# EAGLE board SparkFun_Cryptographic_Co-processor_ATECC608A-Panel (EAGLE 9.6.2), part 1 of 2
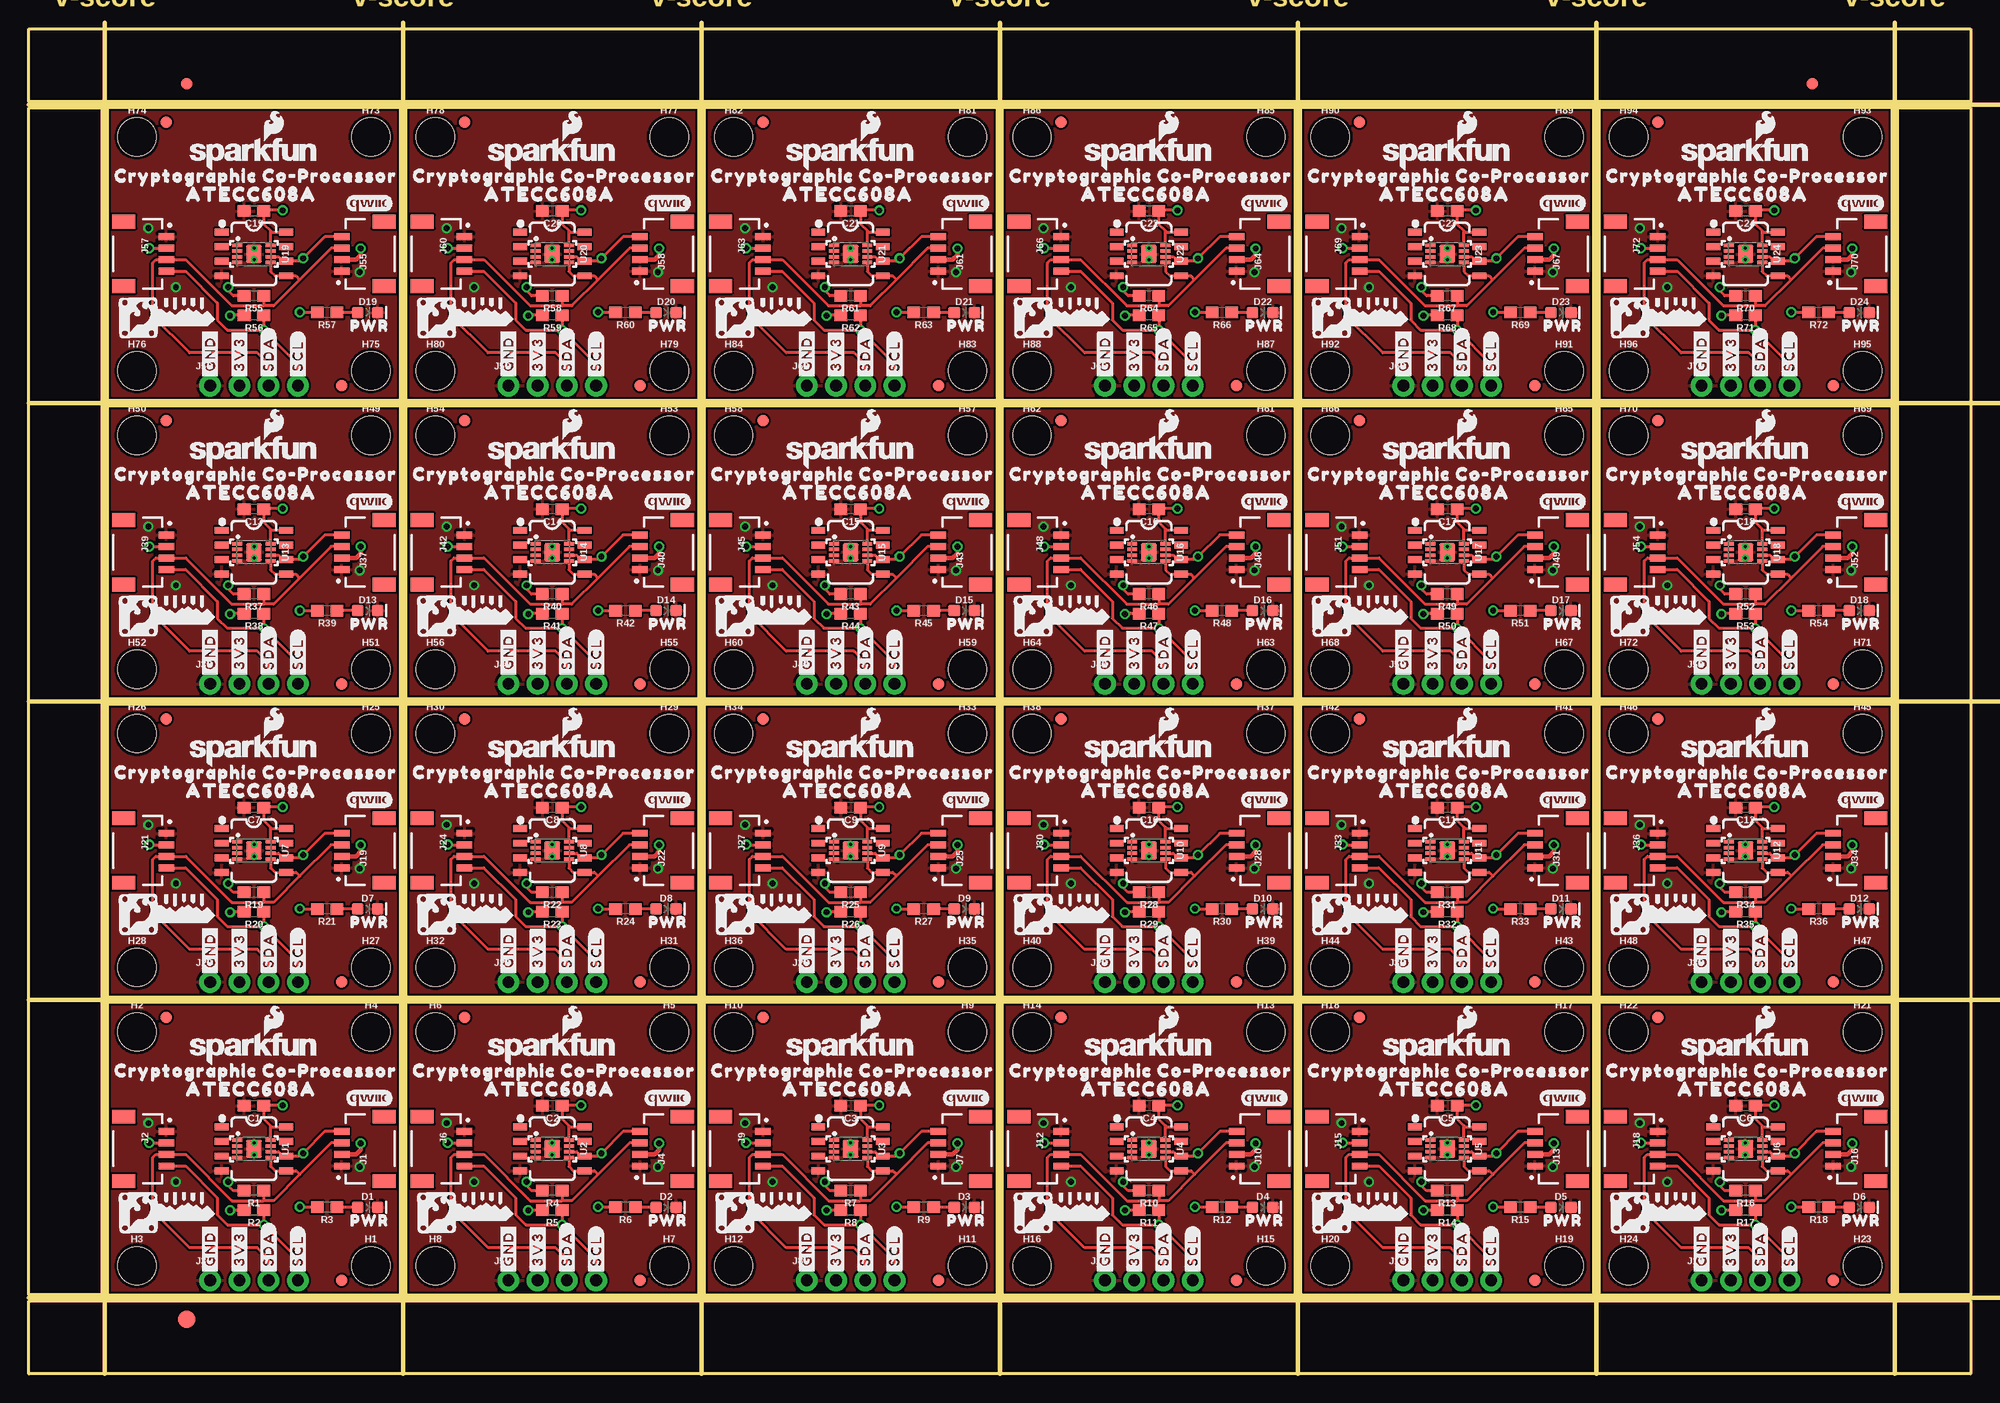
[diagram p0: board, top side]
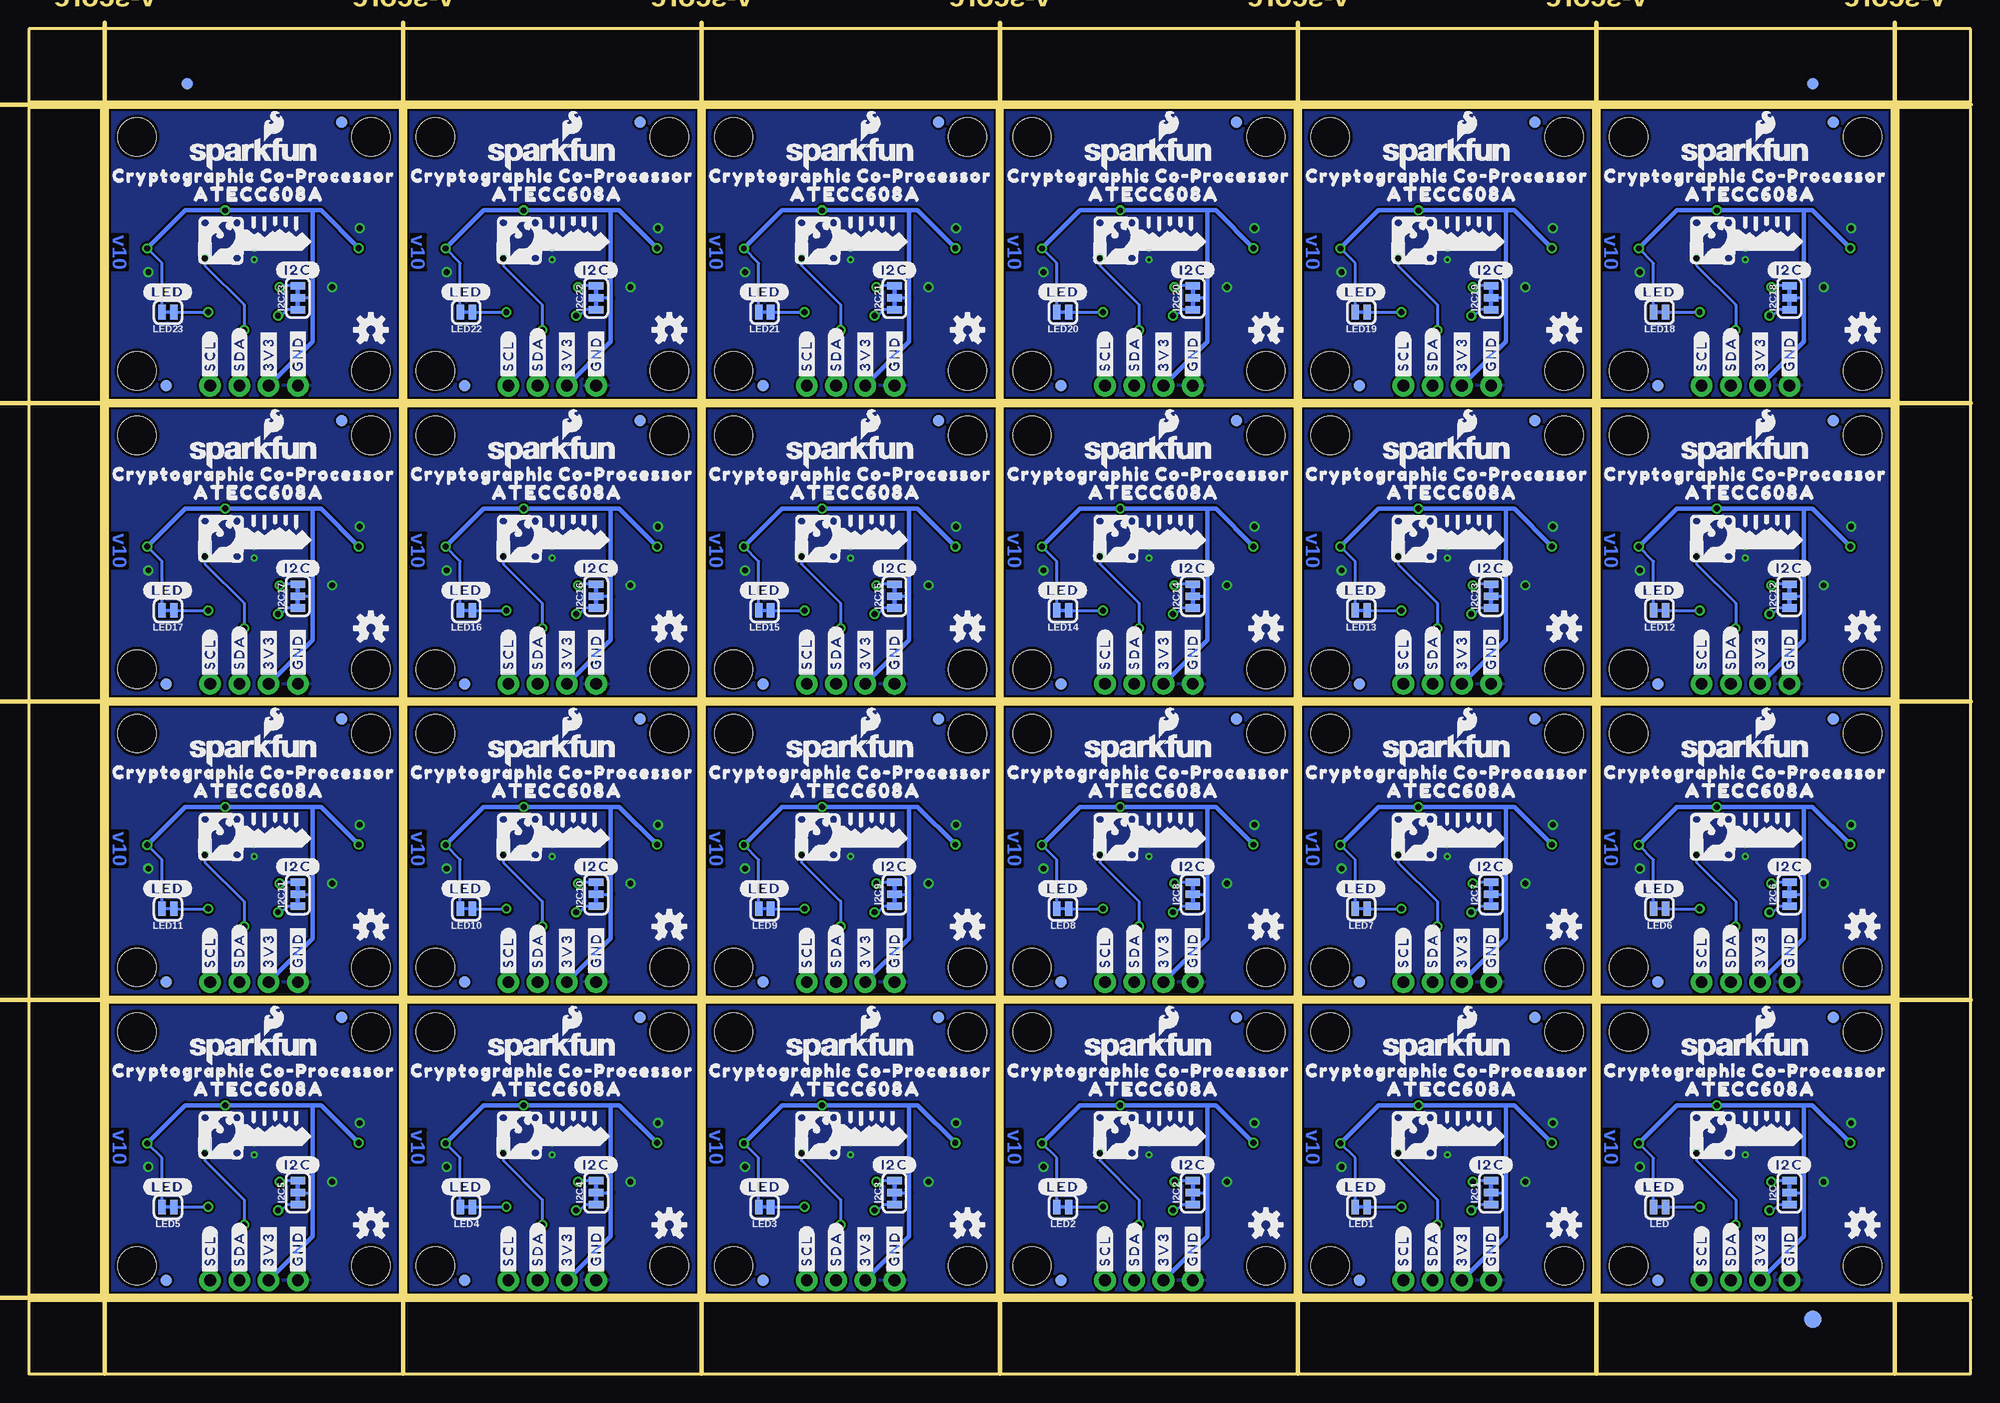
[diagram p1: board, bottom side, seen from below]

Size 168.66 x 116.84 mm. Coordinates in mm from the lower left corner, seen from the top.
Outline: 6.86,6.86 6.86,32.26 32.26,32.26 32.26,6.86 6.86,6.86
Outline: 32.77,6.86 32.77,32.26 58.17,32.26 58.17,6.86 32.77,6.86
Outline: 58.67,6.86 58.67,32.26 84.07,32.26 84.07,6.86 58.67,6.86
Outline: 84.58,6.86 84.58,32.26 109.98,32.26 109.98,6.86 84.58,6.86
Outline: 110.49,6.86 110.49,32.26 135.89,32.26 135.89,6.86 110.49,6.86
Outline: 136.4,6.86 136.4,32.26 161.8,32.26 161.8,6.86 136.4,6.86
Outline: 6.86,32.77 6.86,58.17 32.26,58.17 32.26,32.77 6.86,32.77
Outline: 32.77,32.77 32.77,58.17 58.17,58.17 58.17,32.77 32.77,32.77
Outline: 58.67,32.77 58.67,58.17 84.07,58.17 84.07,32.77 58.67,32.77
Outline: 84.58,32.77 84.58,58.17 109.98,58.17 109.98,32.77 84.58,32.77
Outline: 110.49,32.77 110.49,58.17 135.89,58.17 135.89,32.77 110.49,32.77
Outline: 136.4,32.77 136.4,58.17 161.8,58.17 161.8,32.77 136.4,32.77
Outline: 6.86,58.67 6.86,84.07 32.26,84.07 32.26,58.67 6.86,58.67
Outline: 32.77,58.67 32.77,84.07 58.17,84.07 58.17,58.67 32.77,58.67
Outline: 58.67,58.67 58.67,84.07 84.07,84.07 84.07,58.67 58.67,58.67
Outline: 84.58,58.67 84.58,84.07 109.98,84.07 109.98,58.67 84.58,58.67
Outline: 110.49,58.67 110.49,84.07 135.89,84.07 135.89,58.67 110.49,58.67
Outline: 136.4,58.67 136.4,84.07 161.8,84.07 161.8,58.67 136.4,58.67
Outline: 6.86,84.58 6.86,109.98 32.26,109.98 32.26,84.58 6.86,84.58
Outline: 32.77,84.58 32.77,109.98 58.17,109.98 58.17,84.58 32.77,84.58
Outline: 58.67,84.58 58.67,109.98 84.07,109.98 84.07,84.58 58.67,84.58
Outline: 84.58,84.58 84.58,109.98 109.98,109.98 109.98,84.58 84.58,84.58
Outline: 110.49,84.58 110.49,109.98 135.89,109.98 135.89,84.58 110.49,84.58
Outline: 136.4,84.58 136.4,109.98 161.8,109.98 161.8,84.58 136.4,84.58
Outline: 0,6.35 168.66,6.35 168.66,0 0,0 0,6.35
Outline: 162.31,109.98 168.66,109.98 168.66,6.86 162.31,6.86 162.31,109.98
Outline: 0,116.84 168.66,116.84 168.66,110.49 0,110.49 0,116.84
Outline: 0,109.98 6.35,109.98 6.35,6.86 0,6.86 0,109.98
Copper layers (1*16): Top 0.035mm / dielectric 1.5mm / Bottom 0.035mm
Design rules "SparkFun_Cryptographic_Co-processor_ATECC608A": minimum track width 7mil, minimum drill 0.3mm, track to track 7mil, track to pad 7mil, pad to pad 7mil, via to via 7mil, smd to smd 7mil, copper to edge 7mil, drill to drill 7mil, minimum pad ring 7mil, minimum via ring 7mil, stop-mask expansion 3mil, vias tented up to drill 25mil, thermal gap 10mil
Milling: 12 lines

## Footprints (pad centres in the part's own frame; a part is rotated, then mirrored left to right if it is on the bottom)
0603 = smd 1.1 x 1: 1 -0.85,0; 2 0.85,0
LED-0603 = smd 1 x 1: A -0.877,0; C 0.877,0
FIDUCIAL-1X2 = smd 1 x 1: 1 0,0
FIDUCIAL-1.5X3 = smd 1.5 x 1.5: 1 0,0
STAND-OFF = hole 3.302: 0,0
SMT-JUMPER_3_2-NC_TRACE_SILK = smd 0.66 x 1.27: 1 -1.041,0; 2 0,0; 3 1.041,0
JST04_1MM_RA = smd 0.6 x 1.35: 1 -1.5,0; 2 -0.5,0; 3 0.5,0; 4 1.5,0 | smd 1.2 x 2: NC1 2.8,-3.675; NC2 -2.8,-3.675
1X04_NO_SILK = drill 1.016 pad 1.88: 1 0,0; 2 2.54,0; 3 5.08,0; 4 7.62,0
SMT-JUMPER_2_NC_TRACE_SILK = smd 0.66 x 1.27: 1 -0.521,0; 2 0.521,0
DUAL_UDFN_2X3MM_SOIC-8 = smd 0.3 x 0.85: 1 -0.75,-1.45; 2 -0.25,-1.45; 3 0.25,-1.45; 4 0.75,-1.45; 5 0.75,1.45; 6 0.25,1.45; 7 -0.25,1.45; 8 -0.75,1.45 | smd 0.6 x 1.2: 1S -1.905,-2.8; 2S -0.635,-2.8; 3S 0.635,-2.8; 4S 1.905,-2.8; 5S 1.905,2.8; 6S 0.635,2.8; 7S -0.635,2.8; 8S -1.905,2.8 | smd 1.6 x 1.4: P 0,0

## Placement (x,y rotation side)
C1  0.1uF  [0603]  19.56,23.29 180 top
C2  0.1uF  [0603]  45.47,23.29 180 top
C3  0.1uF  [0603]  71.37,23.29 180 top
C4  0.1uF  [0603]  97.28,23.29 180 top
C5  0.1uF  [0603]  123.19,23.29 180 top
C6  0.1uF  [0603]  149.1,23.29 180 top
C7  0.1uF  [0603]  19.56,49.2 180 top
C8  0.1uF  [0603]  45.47,49.2 180 top
C9  0.1uF  [0603]  71.37,49.2 180 top
C10  0.1uF  [0603]  97.28,49.2 180 top
C11  0.1uF  [0603]  123.19,49.2 180 top
C12  0.1uF  [0603]  149.1,49.2 180 top
C13  0.1uF  [0603]  19.56,75.11 180 top
C14  0.1uF  [0603]  45.47,75.11 180 top
C15  0.1uF  [0603]  71.37,75.11 180 top
C16  0.1uF  [0603]  97.28,75.11 180 top
C17  0.1uF  [0603]  123.19,75.11 180 top
C18  0.1uF  [0603]  149.1,75.11 180 top
C19  0.1uF  [0603]  19.56,101.02 180 top
C20  0.1uF  [0603]  45.47,101.02 180 top
C21  0.1uF  [0603]  71.37,101.02 180 top
C22  0.1uF  [0603]  97.28,101.02 180 top
C23  0.1uF  [0603]  123.19,101.02 180 top
C24  0.1uF  [0603]  149.1,101.02 180 top
D1  RED  [LED-0603]  29.44,14.48 0 top
D2  RED  [LED-0603]  55.35,14.48 0 top
D3  RED  [LED-0603]  81.25,14.48 0 top
D4  RED  [LED-0603]  107.16,14.48 0 top
D5  RED  [LED-0603]  133.07,14.48 0 top
D6  RED  [LED-0603]  158.98,14.48 0 top
D7  RED  [LED-0603]  29.44,40.39 0 top
D8  RED  [LED-0603]  55.35,40.39 0 top
D9  RED  [LED-0603]  81.25,40.39 0 top
D10  RED  [LED-0603]  107.16,40.39 0 top
D11  RED  [LED-0603]  133.07,40.39 0 top
D12  RED  [LED-0603]  158.98,40.39 0 top
D13  RED  [LED-0603]  29.44,66.29 0 top
D14  RED  [LED-0603]  55.35,66.29 0 top
D15  RED  [LED-0603]  81.25,66.29 0 top
D16  RED  [LED-0603]  107.16,66.29 0 top
D17  RED  [LED-0603]  133.07,66.29 0 top
D18  RED  [LED-0603]  158.98,66.29 0 top
D19  RED  [LED-0603]  29.44,92.2 0 top
D20  RED  [LED-0603]  55.35,92.2 0 top
D21  RED  [LED-0603]  81.25,92.2 0 top
D22  RED  [LED-0603]  107.16,92.2 0 top
D23  RED  [LED-0603]  133.07,92.2 0 top
D24  RED  [LED-0603]  158.98,92.2 0 top
E$1  [FIDUCIAL-1X2]  13.72,112.08 0 top
E$2  [FIDUCIAL-1X2]  13.72,112.08 0 bottom
E$3  [FIDUCIAL-1X2]  154.88,112.08 0 top
E$4  [FIDUCIAL-1X2]  154.88,112.08 0 bottom
E$5  [FIDUCIAL-1.5X3]  13.72,4.76 0 top
E$6  [FIDUCIAL-1.5X3]  13.72,4.76 0 bottom
FD1  FIDUCIAL1X2  [FIDUCIAL-1X2]  11.94,30.99 0 top
FD2  FIDUCIAL1X2  [FIDUCIAL-1X2]  27.18,8.13 0 top
FD3  FIDUCIAL1X2  [FIDUCIAL-1X2]  27.18,8.13 0 bottom
FD4  FIDUCIAL1X2  [FIDUCIAL-1X2]  11.94,30.99 0 bottom
FD5  FIDUCIAL1X2  [FIDUCIAL-1X2]  37.85,30.99 0 top
FD6  FIDUCIAL1X2  [FIDUCIAL-1X2]  53.09,8.13 0 top
FD7  FIDUCIAL1X2  [FIDUCIAL-1X2]  53.09,8.13 0 bottom
FD8  FIDUCIAL1X2  [FIDUCIAL-1X2]  37.85,30.99 0 bottom
FD9  FIDUCIAL1X2  [FIDUCIAL-1X2]  63.75,30.99 0 top
FD10  FIDUCIAL1X2  [FIDUCIAL-1X2]  78.99,8.13 0 top
FD11  FIDUCIAL1X2  [FIDUCIAL-1X2]  78.99,8.13 0 bottom
FD12  FIDUCIAL1X2  [FIDUCIAL-1X2]  63.75,30.99 0 bottom
FD13  FIDUCIAL1X2  [FIDUCIAL-1X2]  89.66,30.99 0 top
FD14  FIDUCIAL1X2  [FIDUCIAL-1X2]  104.9,8.13 0 top
FD15  FIDUCIAL1X2  [FIDUCIAL-1X2]  104.9,8.13 0 bottom
FD16  FIDUCIAL1X2  [FIDUCIAL-1X2]  89.66,30.99 0 bottom
FD17  FIDUCIAL1X2  [FIDUCIAL-1X2]  115.57,30.99 0 top
FD18  FIDUCIAL1X2  [FIDUCIAL-1X2]  130.81,8.13 0 top
FD19  FIDUCIAL1X2  [FIDUCIAL-1X2]  130.81,8.13 0 bottom
FD20  FIDUCIAL1X2  [FIDUCIAL-1X2]  115.57,30.99 0 bottom
FD21  FIDUCIAL1X2  [FIDUCIAL-1X2]  141.48,30.99 0 top
FD22  FIDUCIAL1X2  [FIDUCIAL-1X2]  156.72,8.13 0 top
FD23  FIDUCIAL1X2  [FIDUCIAL-1X2]  156.72,8.13 0 bottom
FD24  FIDUCIAL1X2  [FIDUCIAL-1X2]  141.48,30.99 0 bottom
FD25  FIDUCIAL1X2  [FIDUCIAL-1X2]  11.94,56.9 0 top
FD26  FIDUCIAL1X2  [FIDUCIAL-1X2]  27.18,34.04 0 top
FD27  FIDUCIAL1X2  [FIDUCIAL-1X2]  27.18,34.04 0 bottom
FD28  FIDUCIAL1X2  [FIDUCIAL-1X2]  11.94,56.9 0 bottom
FD29  FIDUCIAL1X2  [FIDUCIAL-1X2]  37.85,56.9 0 top
FD30  FIDUCIAL1X2  [FIDUCIAL-1X2]  53.09,34.04 0 top
FD31  FIDUCIAL1X2  [FIDUCIAL-1X2]  53.09,34.04 0 bottom
FD32  FIDUCIAL1X2  [FIDUCIAL-1X2]  37.85,56.9 0 bottom
FD33  FIDUCIAL1X2  [FIDUCIAL-1X2]  63.75,56.9 0 top
FD34  FIDUCIAL1X2  [FIDUCIAL-1X2]  78.99,34.04 0 top
FD35  FIDUCIAL1X2  [FIDUCIAL-1X2]  78.99,34.04 0 bottom
FD36  FIDUCIAL1X2  [FIDUCIAL-1X2]  63.75,56.9 0 bottom
FD37  FIDUCIAL1X2  [FIDUCIAL-1X2]  89.66,56.9 0 top
FD38  FIDUCIAL1X2  [FIDUCIAL-1X2]  104.9,34.04 0 top
FD39  FIDUCIAL1X2  [FIDUCIAL-1X2]  104.9,34.04 0 bottom
FD40  FIDUCIAL1X2  [FIDUCIAL-1X2]  89.66,56.9 0 bottom
FD41  FIDUCIAL1X2  [FIDUCIAL-1X2]  115.57,56.9 0 top
FD42  FIDUCIAL1X2  [FIDUCIAL-1X2]  130.81,34.04 0 top
FD43  FIDUCIAL1X2  [FIDUCIAL-1X2]  130.81,34.04 0 bottom
FD44  FIDUCIAL1X2  [FIDUCIAL-1X2]  115.57,56.9 0 bottom
FD45  FIDUCIAL1X2  [FIDUCIAL-1X2]  141.48,56.9 0 top
FD46  FIDUCIAL1X2  [FIDUCIAL-1X2]  156.72,34.04 0 top
FD47  FIDUCIAL1X2  [FIDUCIAL-1X2]  156.72,34.04 0 bottom
FD48  FIDUCIAL1X2  [FIDUCIAL-1X2]  141.48,56.9 0 bottom
FD49  FIDUCIAL1X2  [FIDUCIAL-1X2]  11.94,82.8 0 top
FD50  FIDUCIAL1X2  [FIDUCIAL-1X2]  27.18,59.94 0 top
FD51  FIDUCIAL1X2  [FIDUCIAL-1X2]  27.18,59.94 0 bottom
FD52  FIDUCIAL1X2  [FIDUCIAL-1X2]  11.94,82.8 0 bottom
FD53  FIDUCIAL1X2  [FIDUCIAL-1X2]  37.85,82.8 0 top
FD54  FIDUCIAL1X2  [FIDUCIAL-1X2]  53.09,59.94 0 top
FD55  FIDUCIAL1X2  [FIDUCIAL-1X2]  53.09,59.94 0 bottom
FD56  FIDUCIAL1X2  [FIDUCIAL-1X2]  37.85,82.8 0 bottom
FD57  FIDUCIAL1X2  [FIDUCIAL-1X2]  63.75,82.8 0 top
FD58  FIDUCIAL1X2  [FIDUCIAL-1X2]  78.99,59.94 0 top
FD59  FIDUCIAL1X2  [FIDUCIAL-1X2]  78.99,59.94 0 bottom
FD60  FIDUCIAL1X2  [FIDUCIAL-1X2]  63.75,82.8 0 bottom
FD61  FIDUCIAL1X2  [FIDUCIAL-1X2]  89.66,82.8 0 top
FD62  FIDUCIAL1X2  [FIDUCIAL-1X2]  104.9,59.94 0 top
FD63  FIDUCIAL1X2  [FIDUCIAL-1X2]  104.9,59.94 0 bottom
FD64  FIDUCIAL1X2  [FIDUCIAL-1X2]  89.66,82.8 0 bottom
FD65  FIDUCIAL1X2  [FIDUCIAL-1X2]  115.57,82.8 0 top
FD66  FIDUCIAL1X2  [FIDUCIAL-1X2]  130.81,59.94 0 top
FD67  FIDUCIAL1X2  [FIDUCIAL-1X2]  130.81,59.94 0 bottom
FD68  FIDUCIAL1X2  [FIDUCIAL-1X2]  115.57,82.8 0 bottom
FD69  FIDUCIAL1X2  [FIDUCIAL-1X2]  141.48,82.8 0 top
FD70  FIDUCIAL1X2  [FIDUCIAL-1X2]  156.72,59.94 0 top
FD71  FIDUCIAL1X2  [FIDUCIAL-1X2]  156.72,59.94 0 bottom
FD72  FIDUCIAL1X2  [FIDUCIAL-1X2]  141.48,82.8 0 bottom
FD73  FIDUCIAL1X2  [FIDUCIAL-1X2]  11.94,108.71 0 top
FD74  FIDUCIAL1X2  [FIDUCIAL-1X2]  27.18,85.85 0 top
FD75  FIDUCIAL1X2  [FIDUCIAL-1X2]  27.18,85.85 0 bottom
FD76  FIDUCIAL1X2  [FIDUCIAL-1X2]  11.94,108.71 0 bottom
FD77  FIDUCIAL1X2  [FIDUCIAL-1X2]  37.85,108.71 0 top
FD78  FIDUCIAL1X2  [FIDUCIAL-1X2]  53.09,85.85 0 top
FD79  FIDUCIAL1X2  [FIDUCIAL-1X2]  53.09,85.85 0 bottom
FD80  FIDUCIAL1X2  [FIDUCIAL-1X2]  37.85,108.71 0 bottom
FD81  FIDUCIAL1X2  [FIDUCIAL-1X2]  63.75,108.71 0 top
FD82  FIDUCIAL1X2  [FIDUCIAL-1X2]  78.99,85.85 0 top
FD83  FIDUCIAL1X2  [FIDUCIAL-1X2]  78.99,85.85 0 bottom
FD84  FIDUCIAL1X2  [FIDUCIAL-1X2]  63.75,108.71 0 bottom
FD85  FIDUCIAL1X2  [FIDUCIAL-1X2]  89.66,108.71 0 top
FD86  FIDUCIAL1X2  [FIDUCIAL-1X2]  104.9,85.85 0 top
FD87  FIDUCIAL1X2  [FIDUCIAL-1X2]  104.9,85.85 0 bottom
FD88  FIDUCIAL1X2  [FIDUCIAL-1X2]  89.66,108.71 0 bottom
FD89  FIDUCIAL1X2  [FIDUCIAL-1X2]  115.57,108.71 0 top
FD90  FIDUCIAL1X2  [FIDUCIAL-1X2]  130.81,85.85 0 top
FD91  FIDUCIAL1X2  [FIDUCIAL-1X2]  130.81,85.85 0 bottom
FD92  FIDUCIAL1X2  [FIDUCIAL-1X2]  115.57,108.71 0 bottom
FD93  FIDUCIAL1X2  [FIDUCIAL-1X2]  141.48,108.71 0 top
FD94  FIDUCIAL1X2  [FIDUCIAL-1X2]  156.72,85.85 0 top
FD95  FIDUCIAL1X2  [FIDUCIAL-1X2]  156.72,85.85 0 bottom
FD96  FIDUCIAL1X2  [FIDUCIAL-1X2]  141.48,108.71 0 bottom
H1  STAND-OFF  [STAND-OFF]  29.72,9.4 0 top
H2  STAND-OFF  [STAND-OFF]  9.4,29.72 0 top
H3  STAND-OFF  [STAND-OFF]  9.4,9.4 0 top
H4  STAND-OFF  [STAND-OFF]  29.72,29.72 0 top
H5  STAND-OFF  [STAND-OFF]  55.63,29.72 0 top
H6  STAND-OFF  [STAND-OFF]  35.31,29.72 0 top
H7  STAND-OFF  [STAND-OFF]  55.63,9.4 0 top
H8  STAND-OFF  [STAND-OFF]  35.31,9.4 0 top
H9  STAND-OFF  [STAND-OFF]  81.53,29.72 0 top
H10  STAND-OFF  [STAND-OFF]  61.21,29.72 0 top
H11  STAND-OFF  [STAND-OFF]  81.53,9.4 0 top
H12  STAND-OFF  [STAND-OFF]  61.21,9.4 0 top
H13  STAND-OFF  [STAND-OFF]  107.44,29.72 0 top
H14  STAND-OFF  [STAND-OFF]  87.12,29.72 0 top
H15  STAND-OFF  [STAND-OFF]  107.44,9.4 0 top
H16  STAND-OFF  [STAND-OFF]  87.12,9.4 0 top
H17  STAND-OFF  [STAND-OFF]  133.35,29.72 0 top
H18  STAND-OFF  [STAND-OFF]  113.03,29.72 0 top
H19  STAND-OFF  [STAND-OFF]  133.35,9.4 0 top
H20  STAND-OFF  [STAND-OFF]  113.03,9.4 0 top
H21  STAND-OFF  [STAND-OFF]  159.26,29.72 0 top
H22  STAND-OFF  [STAND-OFF]  138.94,29.72 0 top
H23  STAND-OFF  [STAND-OFF]  159.26,9.4 0 top
H24  STAND-OFF  [STAND-OFF]  138.94,9.4 0 top
H25  STAND-OFF  [STAND-OFF]  29.72,55.63 0 top
H26  STAND-OFF  [STAND-OFF]  9.4,55.63 0 top
H27  STAND-OFF  [STAND-OFF]  29.72,35.31 0 top
H28  STAND-OFF  [STAND-OFF]  9.4,35.31 0 top
H29  STAND-OFF  [STAND-OFF]  55.63,55.63 0 top
H30  STAND-OFF  [STAND-OFF]  35.31,55.63 0 top
H31  STAND-OFF  [STAND-OFF]  55.63,35.31 0 top
H32  STAND-OFF  [STAND-OFF]  35.31,35.31 0 top
H33  STAND-OFF  [STAND-OFF]  81.53,55.63 0 top
H34  STAND-OFF  [STAND-OFF]  61.21,55.63 0 top
H35  STAND-OFF  [STAND-OFF]  81.53,35.31 0 top
H36  STAND-OFF  [STAND-OFF]  61.21,35.31 0 top
H37  STAND-OFF  [STAND-OFF]  107.44,55.63 0 top
H38  STAND-OFF  [STAND-OFF]  87.12,55.63 0 top
H39  STAND-OFF  [STAND-OFF]  107.44,35.31 0 top
H40  STAND-OFF  [STAND-OFF]  87.12,35.31 0 top
H41  STAND-OFF  [STAND-OFF]  133.35,55.63 0 top
H42  STAND-OFF  [STAND-OFF]  113.03,55.63 0 top
H43  STAND-OFF  [STAND-OFF]  133.35,35.31 0 top
H44  STAND-OFF  [STAND-OFF]  113.03,35.31 0 top
H45  STAND-OFF  [STAND-OFF]  159.26,55.63 0 top
H46  STAND-OFF  [STAND-OFF]  138.94,55.63 0 top
H47  STAND-OFF  [STAND-OFF]  159.26,35.31 0 top
H48  STAND-OFF  [STAND-OFF]  138.94,35.31 0 top
H49  STAND-OFF  [STAND-OFF]  29.72,81.53 0 top
H50  STAND-OFF  [STAND-OFF]  9.4,81.53 0 top
H51  STAND-OFF  [STAND-OFF]  29.72,61.21 0 top
H52  STAND-OFF  [STAND-OFF]  9.4,61.21 0 top
H53  STAND-OFF  [STAND-OFF]  55.63,81.53 0 top
H54  STAND-OFF  [STAND-OFF]  35.31,81.53 0 top
H55  STAND-OFF  [STAND-OFF]  55.63,61.21 0 top
H56  STAND-OFF  [STAND-OFF]  35.31,61.21 0 top
H57  STAND-OFF  [STAND-OFF]  81.53,81.53 0 top
H58  STAND-OFF  [STAND-OFF]  61.21,81.53 0 top
H59  STAND-OFF  [STAND-OFF]  81.53,61.21 0 top
H60  STAND-OFF  [STAND-OFF]  61.21,61.21 0 top
H61  STAND-OFF  [STAND-OFF]  107.44,81.53 0 top
H62  STAND-OFF  [STAND-OFF]  87.12,81.53 0 top
H63  STAND-OFF  [STAND-OFF]  107.44,61.21 0 top
H64  STAND-OFF  [STAND-OFF]  87.12,61.21 0 top
H65  STAND-OFF  [STAND-OFF]  133.35,81.53 0 top
H66  STAND-OFF  [STAND-OFF]  113.03,81.53 0 top
H67  STAND-OFF  [STAND-OFF]  133.35,61.21 0 top
H68  STAND-OFF  [STAND-OFF]  113.03,61.21 0 top
H69  STAND-OFF  [STAND-OFF]  159.26,81.53 0 top
H70  STAND-OFF  [STAND-OFF]  138.94,81.53 0 top
H71  STAND-OFF  [STAND-OFF]  159.26,61.21 0 top
H72  STAND-OFF  [STAND-OFF]  138.94,61.21 0 top
H73  STAND-OFF  [STAND-OFF]  29.72,107.44 0 top
H74  STAND-OFF  [STAND-OFF]  9.4,107.44 0 top
H75  STAND-OFF  [STAND-OFF]  29.72,87.12 0 top
H76  STAND-OFF  [STAND-OFF]  9.4,87.12 0 top
H77  STAND-OFF  [STAND-OFF]  55.63,107.44 0 top
H78  STAND-OFF  [STAND-OFF]  35.31,107.44 0 top
H79  STAND-OFF  [STAND-OFF]  55.63,87.12 0 top
H80  STAND-OFF  [STAND-OFF]  35.31,87.12 0 top
H81  STAND-OFF  [STAND-OFF]  81.53,107.44 0 top
H82  STAND-OFF  [STAND-OFF]  61.21,107.44 0 top
H83  STAND-OFF  [STAND-OFF]  81.53,87.12 0 top
H84  STAND-OFF  [STAND-OFF]  61.21,87.12 0 top
H85  STAND-OFF  [STAND-OFF]  107.44,107.44 0 top
H86  STAND-OFF  [STAND-OFF]  87.12,107.44 0 top
H87  STAND-OFF  [STAND-OFF]  107.44,87.12 0 top
H88  STAND-OFF  [STAND-OFF]  87.12,87.12 0 top
H89  STAND-OFF  [STAND-OFF]  133.35,107.44 0 top
H90  STAND-OFF  [STAND-OFF]  113.03,107.44 0 top
H91  STAND-OFF  [STAND-OFF]  133.35,87.12 0 top
H92  STAND-OFF  [STAND-OFF]  113.03,87.12 0 top
H93  STAND-OFF  [STAND-OFF]  159.26,107.44 0 top
H94  STAND-OFF  [STAND-OFF]  138.94,107.44 0 top
H95  STAND-OFF  [STAND-OFF]  159.26,87.12 0 top
H96  STAND-OFF  [STAND-OFF]  138.94,87.12 0 top
I2C  [SMT-JUMPER_3_2-NC_TRACE_SILK]  15.75,15.75 90 bottom
I2C1  [SMT-JUMPER_3_2-NC_TRACE_SILK]  41.66,15.75 90 bottom
I2C2  [SMT-JUMPER_3_2-NC_TRACE_SILK]  67.56,15.75 90 bottom
I2C3  [SMT-JUMPER_3_2-NC_TRACE_SILK]  93.47,15.75 90 bottom
I2C4  [SMT-JUMPER_3_2-NC_TRACE_SILK]  119.38,15.75 90 bottom
I2C5  [SMT-JUMPER_3_2-NC_TRACE_SILK]  145.29,15.75 90 bottom
I2C6  [SMT-JUMPER_3_2-NC_TRACE_SILK]  15.75,41.66 90 bottom
I2C7  [SMT-JUMPER_3_2-NC_TRACE_SILK]  41.66,41.66 90 bottom
I2C8  [SMT-JUMPER_3_2-NC_TRACE_SILK]  67.56,41.66 90 bottom
I2C9  [SMT-JUMPER_3_2-NC_TRACE_SILK]  93.47,41.66 90 bottom
I2C10  [SMT-JUMPER_3_2-NC_TRACE_SILK]  119.38,41.66 90 bottom
I2C11  [SMT-JUMPER_3_2-NC_TRACE_SILK]  145.29,41.66 90 bottom
I2C12  [SMT-JUMPER_3_2-NC_TRACE_SILK]  15.75,67.56 90 bottom
I2C13  [SMT-JUMPER_3_2-NC_TRACE_SILK]  41.66,67.56 90 bottom
I2C14  [SMT-JUMPER_3_2-NC_TRACE_SILK]  67.56,67.56 90 bottom
I2C15  [SMT-JUMPER_3_2-NC_TRACE_SILK]  93.47,67.56 90 bottom
I2C16  [SMT-JUMPER_3_2-NC_TRACE_SILK]  119.38,67.56 90 bottom
I2C17  [SMT-JUMPER_3_2-NC_TRACE_SILK]  145.29,67.56 90 bottom
I2C18  [SMT-JUMPER_3_2-NC_TRACE_SILK]  15.75,93.47 90 bottom
I2C19  [SMT-JUMPER_3_2-NC_TRACE_SILK]  41.66,93.47 90 bottom
I2C20  [SMT-JUMPER_3_2-NC_TRACE_SILK]  67.56,93.47 90 bottom
I2C21  [SMT-JUMPER_3_2-NC_TRACE_SILK]  93.47,93.47 90 bottom
I2C22  [SMT-JUMPER_3_2-NC_TRACE_SILK]  119.38,93.47 90 bottom
I2C23  [SMT-JUMPER_3_2-NC_TRACE_SILK]  145.29,93.47 90 bottom
J1  QWIIC  [JST04_1MM_RA]  27.18,19.56 90 top
J2  QWIIC  [JST04_1MM_RA]  11.94,19.56 270 top
J3  PTH  [1X04_NO_SILK]  15.75,8.13 0 top
J4  QWIIC  [JST04_1MM_RA]  53.09,19.56 90 top
J5  PTH  [1X04_NO_SILK]  41.66,8.13 0 top
J6  QWIIC  [JST04_1MM_RA]  37.85,19.56 270 top
J7  QWIIC  [JST04_1MM_RA]  78.99,19.56 90 top
J8  PTH  [1X04_NO_SILK]  67.56,8.13 0 top
J9  QWIIC  [JST04_1MM_RA]  63.75,19.56 270 top
J10  QWIIC  [JST04_1MM_RA]  104.9,19.56 90 top
J11  PTH  [1X04_NO_SILK]  93.47,8.13 0 top
J12  QWIIC  [JST04_1MM_RA]  89.66,19.56 270 top
J13  QWIIC  [JST04_1MM_RA]  130.81,19.56 90 top
J14  PTH  [1X04_NO_SILK]  119.38,8.13 0 top
J15  QWIIC  [JST04_1MM_RA]  115.57,19.56 270 top
J16  QWIIC  [JST04_1MM_RA]  156.72,19.56 90 top
J17  PTH  [1X04_NO_SILK]  145.29,8.13 0 top
J18  QWIIC  [JST04_1MM_RA]  141.48,19.56 270 top
J19  QWIIC  [JST04_1MM_RA]  27.18,45.47 90 top
J20  PTH  [1X04_NO_SILK]  15.75,34.04 0 top
J21  QWIIC  [JST04_1MM_RA]  11.94,45.47 270 top
J22  QWIIC  [JST04_1MM_RA]  53.09,45.47 90 top
J23  PTH  [1X04_NO_SILK]  41.66,34.04 0 top
J24  QWIIC  [JST04_1MM_RA]  37.85,45.47 270 top
J25  QWIIC  [JST04_1MM_RA]  78.99,45.47 90 top
J26  PTH  [1X04_NO_SILK]  67.56,34.04 0 top
J27  QWIIC  [JST04_1MM_RA]  63.75,45.47 270 top
J28  QWIIC  [JST04_1MM_RA]  104.9,45.47 90 top
J29  PTH  [1X04_NO_SILK]  93.47,34.04 0 top
J30  QWIIC  [JST04_1MM_RA]  89.66,45.47 270 top
J31  QWIIC  [JST04_1MM_RA]  130.81,45.47 90 top
J32  PTH  [1X04_NO_SILK]  119.38,34.04 0 top
J33  QWIIC  [JST04_1MM_RA]  115.57,45.47 270 top
J34  QWIIC  [JST04_1MM_RA]  156.72,45.47 90 top
J35  PTH  [1X04_NO_SILK]  145.29,34.04 0 top
J36  QWIIC  [JST04_1MM_RA]  141.48,45.47 270 top
J37  QWIIC  [JST04_1MM_RA]  27.18,71.37 90 top
J38  PTH  [1X04_NO_SILK]  15.75,59.94 0 top
J39  QWIIC  [JST04_1MM_RA]  11.94,71.37 270 top
J40  QWIIC  [JST04_1MM_RA]  53.09,71.37 90 top
J41  PTH  [1X04_NO_SILK]  41.66,59.94 0 top
J42  QWIIC  [JST04_1MM_RA]  37.85,71.37 270 top
J43  QWIIC  [JST04_1MM_RA]  78.99,71.37 90 top
J44  PTH  [1X04_NO_SILK]  67.56,59.94 0 top
J45  QWIIC  [JST04_1MM_RA]  63.75,71.37 270 top
J46  QWIIC  [JST04_1MM_RA]  104.9,71.37 90 top
J47  PTH  [1X04_NO_SILK]  93.47,59.94 0 top
J48  QWIIC  [JST04_1MM_RA]  89.66,71.37 270 top
J49  QWIIC  [JST04_1MM_RA]  130.81,71.37 90 top
J50  PTH  [1X04_NO_SILK]  119.38,59.94 0 top
J51  QWIIC  [JST04_1MM_RA]  115.57,71.37 270 top
J52  QWIIC  [JST04_1MM_RA]  156.72,71.37 90 top
J53  PTH  [1X04_NO_SILK]  145.29,59.94 0 top
J54  QWIIC  [JST04_1MM_RA]  141.48,71.37 270 top
J55  QWIIC  [JST04_1MM_RA]  27.18,97.28 90 top
J56  PTH  [1X04_NO_SILK]  15.75,85.85 0 top
J57  QWIIC  [JST04_1MM_RA]  11.94,97.28 270 top
J58  QWIIC  [JST04_1MM_RA]  53.09,97.28 90 top
J59  PTH  [1X04_NO_SILK]  41.66,85.85 0 top
J60  QWIIC  [JST04_1MM_RA]  37.85,97.28 270 top
J61  QWIIC  [JST04_1MM_RA]  78.99,97.28 90 top
J62  PTH  [1X04_NO_SILK]  67.56,85.85 0 top
J63  QWIIC  [JST04_1MM_RA]  63.75,97.28 270 top
J64  QWIIC  [JST04_1MM_RA]  104.9,97.28 90 top
J65  PTH  [1X04_NO_SILK]  93.47,85.85 0 top
J66  QWIIC  [JST04_1MM_RA]  89.66,97.28 270 top
J67  QWIIC  [JST04_1MM_RA]  130.81,97.28 90 top
J68  PTH  [1X04_NO_SILK]  119.38,85.85 0 top
J69  QWIIC  [JST04_1MM_RA]  115.57,97.28 270 top
J70  QWIIC  [JST04_1MM_RA]  156.72,97.28 90 top
J71  PTH  [1X04_NO_SILK]  145.29,85.85 0 top
J72  QWIIC  [JST04_1MM_RA]  141.48,97.28 270 top
LED  [SMT-JUMPER_2_NC_TRACE_SILK]  27.03,14.5 180 bottom
LED1  [SMT-JUMPER_2_NC_TRACE_SILK]  52.93,14.5 180 bottom
LED2  [SMT-JUMPER_2_NC_TRACE_SILK]  78.84,14.5 180 bottom
LED3  [SMT-JUMPER_2_NC_TRACE_SILK]  104.75,14.5 180 bottom
LED4  [SMT-JUMPER_2_NC_TRACE_SILK]  130.66,14.5 180 bottom
LED5  [SMT-JUMPER_2_NC_TRACE_SILK]  156.57,14.5 180 bottom
LED6  [SMT-JUMPER_2_NC_TRACE_SILK]  27.03,40.41 180 bottom
LED7  [SMT-JUMPER_2_NC_TRACE_SILK]  52.93,40.41 180 bottom
LED8  [SMT-JUMPER_2_NC_TRACE_SILK]  78.84,40.41 180 bottom
LED9  [SMT-JUMPER_2_NC_TRACE_SILK]  104.75,40.41 180 bottom
LED10  [SMT-JUMPER_2_NC_TRACE_SILK]  130.66,40.41 180 bottom
LED11  [SMT-JUMPER_2_NC_TRACE_SILK]  156.57,40.41 180 bottom
LED12  [SMT-JUMPER_2_NC_TRACE_SILK]  27.03,66.32 180 bottom
LED13  [SMT-JUMPER_2_NC_TRACE_SILK]  52.93,66.32 180 bottom
LED14  [SMT-JUMPER_2_NC_TRACE_SILK]  78.84,66.32 180 bottom
LED15  [SMT-JUMPER_2_NC_TRACE_SILK]  104.75,66.32 180 bottom
LED16  [SMT-JUMPER_2_NC_TRACE_SILK]  130.66,66.32 180 bottom
LED17  [SMT-JUMPER_2_NC_TRACE_SILK]  156.57,66.32 180 bottom
LED18  [SMT-JUMPER_2_NC_TRACE_SILK]  27.03,92.23 180 bottom
LED19  [SMT-JUMPER_2_NC_TRACE_SILK]  52.93,92.23 180 bottom
LED20  [SMT-JUMPER_2_NC_TRACE_SILK]  78.84,92.23 180 bottom
LED21  [SMT-JUMPER_2_NC_TRACE_SILK]  104.75,92.23 180 bottom
LED22  [SMT-JUMPER_2_NC_TRACE_SILK]  130.66,92.23 180 bottom
LED23  [SMT-JUMPER_2_NC_TRACE_SILK]  156.57,92.23 180 bottom
LOGO1  SFE_LOGO_NAME_FLAME.1_INCH  [SFE_LOGO_NAME_FLAME_.1]  19.56,28.26 0 top
LOGO2  SFE_LOGO_NAME_FLAME.1_INCH  [SFE_LOGO_NAME_FLAME_.1]  19.56,28.26 0 bottom
LOGO3  QWIIC_LOGO_4MM  [QWIIC_4MM]  29.59,23.95 0 top
LOGO4  OSHW-LOGOS  [OSHW-LOGO-S]  9.4,12.95 0 bottom
LOGO5  OSHW-LOGOS  [OSHW-LOGO-S]  35.31,12.95 0 bottom
LOGO6  SFE_LOGO_NAME_FLAME.1_INCH  [SFE_LOGO_NAME_FLAME_.1]  45.47,28.26 0 top
LOGO7  SFE_LOGO_NAME_FLAME.1_INCH  [SFE_LOGO_NAME_FLAME_.1]  45.47,28.26 0 bottom
LOGO8  QWIIC_LOGO_4MM  [QWIIC_4MM]  55.5,23.95 0 top
LOGO9  OSHW-LOGOS  [OSHW-LOGO-S]  61.21,12.95 0 bottom
LOGO10  SFE_LOGO_NAME_FLAME.1_INCH  [SFE_LOGO_NAME_FLAME_.1]  71.37,28.26 0 top
LOGO11  SFE_LOGO_NAME_FLAME.1_INCH  [SFE_LOGO_NAME_FLAME_.1]  71.37,28.26 0 bottom
LOGO12  QWIIC_LOGO_4MM  [QWIIC_4MM]  81.41,23.95 0 top
LOGO13  OSHW-LOGOS  [OSHW-LOGO-S]  87.12,12.95 0 bottom
LOGO14  SFE_LOGO_NAME_FLAME.1_INCH  [SFE_LOGO_NAME_FLAME_.1]  97.28,28.26 0 top
LOGO15  SFE_LOGO_NAME_FLAME.1_INCH  [SFE_LOGO_NAME_FLAME_.1]  97.28,28.26 0 bottom
LOGO16  QWIIC_LOGO_4MM  [QWIIC_4MM]  107.31,23.95 0 top
LOGO17  OSHW-LOGOS  [OSHW-LOGO-S]  113.03,12.95 0 bottom
LOGO18  SFE_LOGO_NAME_FLAME.1_INCH  [SFE_LOGO_NAME_FLAME_.1]  123.19,28.26 0 top
LOGO19  SFE_LOGO_NAME_FLAME.1_INCH  [SFE_LOGO_NAME_FLAME_.1]  123.19,28.26 0 bottom
LOGO20  QWIIC_LOGO_4MM  [QWIIC_4MM]  133.22,23.95 0 top
LOGO21  OSHW-LOGOS  [OSHW-LOGO-S]  138.94,12.95 0 bottom
LOGO22  SFE_LOGO_NAME_FLAME.1_INCH  [SFE_LOGO_NAME_FLAME_.1]  149.1,28.26 0 top
LOGO23  SFE_LOGO_NAME_FLAME.1_INCH  [SFE_LOGO_NAME_FLAME_.1]  149.1,28.26 0 bottom
LOGO24  QWIIC_LOGO_4MM  [QWIIC_4MM]  159.13,23.95 0 top
LOGO25  OSHW-LOGOS  [OSHW-LOGO-S]  9.4,38.86 0 bottom
LOGO26  SFE_LOGO_NAME_FLAME.1_INCH  [SFE_LOGO_NAME_FLAME_.1]  19.56,54.17 0 top
LOGO27  SFE_LOGO_NAME_FLAME.1_INCH  [SFE_LOGO_NAME_FLAME_.1]  19.56,54.17 0 bottom
LOGO28  QWIIC_LOGO_4MM  [QWIIC_4MM]  29.59,49.86 0 top
LOGO29  OSHW-LOGOS  [OSHW-LOGO-S]  35.31,38.86 0 bottom
LOGO30  SFE_LOGO_NAME_FLAME.1_INCH  [SFE_LOGO_NAME_FLAME_.1]  45.47,54.17 0 top
LOGO31  SFE_LOGO_NAME_FLAME.1_INCH  [SFE_LOGO_NAME_FLAME_.1]  45.47,54.17 0 bottom
LOGO32  QWIIC_LOGO_4MM  [QWIIC_4MM]  55.5,49.86 0 top
LOGO33  OSHW-LOGOS  [OSHW-LOGO-S]  61.21,38.86 0 bottom
LOGO34  SFE_LOGO_NAME_FLAME.1_INCH  [SFE_LOGO_NAME_FLAME_.1]  71.37,54.17 0 top
LOGO35  SFE_LOGO_NAME_FLAME.1_INCH  [SFE_LOGO_NAME_FLAME_.1]  71.37,54.17 0 bottom
LOGO36  QWIIC_LOGO_4MM  [QWIIC_4MM]  81.41,49.86 0 top
LOGO37  OSHW-LOGOS  [OSHW-LOGO-S]  87.12,38.86 0 bottom
LOGO38  SFE_LOGO_NAME_FLAME.1_INCH  [SFE_LOGO_NAME_FLAME_.1]  97.28,54.17 0 top
LOGO39  SFE_LOGO_NAME_FLAME.1_INCH  [SFE_LOGO_NAME_FLAME_.1]  97.28,54.17 0 bottom
LOGO40  QWIIC_LOGO_4MM  [QWIIC_4MM]  107.31,49.86 0 top
LOGO41  OSHW-LOGOS  [OSHW-LOGO-S]  113.03,38.86 0 bottom
LOGO42  SFE_LOGO_NAME_FLAME.1_INCH  [SFE_LOGO_NAME_FLAME_.1]  123.19,54.17 0 top
LOGO43  SFE_LOGO_NAME_FLAME.1_INCH  [SFE_LOGO_NAME_FLAME_.1]  123.19,54.17 0 bottom
LOGO44  QWIIC_LOGO_4MM  [QWIIC_4MM]  133.22,49.86 0 top
LOGO45  OSHW-LOGOS  [OSHW-LOGO-S]  138.94,38.86 0 bottom
LOGO46  SFE_LOGO_NAME_FLAME.1_INCH  [SFE_LOGO_NAME_FLAME_.1]  149.1,54.17 0 top
LOGO47  SFE_LOGO_NAME_FLAME.1_INCH  [SFE_LOGO_NAME_FLAME_.1]  149.1,54.17 0 bottom
LOGO48  QWIIC_LOGO_4MM  [QWIIC_4MM]  159.13,49.86 0 top
LOGO49  OSHW-LOGOS  [OSHW-LOGO-S]  9.4,64.77 0 bottom
LOGO50  SFE_LOGO_NAME_FLAME.1_INCH  [SFE_LOGO_NAME_FLAME_.1]  19.56,80.08 0 top
LOGO51  SFE_LOGO_NAME_FLAME.1_INCH  [SFE_LOGO_NAME_FLAME_.1]  19.56,80.08 0 bottom
LOGO52  QWIIC_LOGO_4MM  [QWIIC_4MM]  29.59,75.77 0 top
LOGO53  OSHW-LOGOS  [OSHW-LOGO-S]  35.31,64.77 0 bottom
LOGO54  SFE_LOGO_NAME_FLAME.1_INCH  [SFE_LOGO_NAME_FLAME_.1]  45.47,80.08 0 top
LOGO55  SFE_LOGO_NAME_FLAME.1_INCH  [SFE_LOGO_NAME_FLAME_.1]  45.47,80.08 0 bottom
LOGO56  QWIIC_LOGO_4MM  [QWIIC_4MM]  55.5,75.77 0 top
LOGO57  OSHW-LOGOS  [OSHW-LOGO-S]  61.21,64.77 0 bottom
LOGO58  SFE_LOGO_NAME_FLAME.1_INCH  [SFE_LOGO_NAME_FLAME_.1]  71.37,80.08 0 top
LOGO59  SFE_LOGO_NAME_FLAME.1_INCH  [SFE_LOGO_NAME_FLAME_.1]  71.37,80.08 0 bottom
LOGO60  QWIIC_LOGO_4MM  [QWIIC_4MM]  81.41,75.77 0 top
LOGO61  OSHW-LOGOS  [OSHW-LOGO-S]  87.12,64.77 0 bottom
LOGO62  SFE_LOGO_NAME_FLAME.1_INCH  [SFE_LOGO_NAME_FLAME_.1]  97.28,80.08 0 top
LOGO63  SFE_LOGO_NAME_FLAME.1_INCH  [SFE_LOGO_NAME_FLAME_.1]  97.28,80.08 0 bottom
LOGO64  QWIIC_LOGO_4MM  [QWIIC_4MM]  107.31,75.77 0 top
LOGO65  OSHW-LOGOS  [OSHW-LOGO-S]  113.03,64.77 0 bottom
LOGO66  SFE_LOGO_NAME_FLAME.1_INCH  [SFE_LOGO_NAME_FLAME_.1]  123.19,80.08 0 top
LOGO67  SFE_LOGO_NAME_FLAME.1_INCH  [SFE_LOGO_NAME_FLAME_.1]  123.19,80.08 0 bottom
LOGO68  QWIIC_LOGO_4MM  [QWIIC_4MM]  133.22,75.77 0 top
LOGO69  OSHW-LOGOS  [OSHW-LOGO-S]  138.94,64.77 0 bottom
LOGO70  SFE_LOGO_NAME_FLAME.1_INCH  [SFE_LOGO_NAME_FLAME_.1]  149.1,80.08 0 top
LOGO71  SFE_LOGO_NAME_FLAME.1_INCH  [SFE_LOGO_NAME_FLAME_.1]  149.1,80.08 0 bottom
LOGO72  QWIIC_LOGO_4MM  [QWIIC_4MM]  159.13,75.77 0 top
LOGO73  OSHW-LOGOS  [OSHW-LOGO-S]  9.4,90.68 0 bottom
LOGO74  SFE_LOGO_NAME_FLAME.1_INCH  [SFE_LOGO_NAME_FLAME_.1]  19.56,105.99 0 top
LOGO75  SFE_LOGO_NAME_FLAME.1_INCH  [SFE_LOGO_NAME_FLAME_.1]  19.56,105.99 0 bottom
LOGO76  QWIIC_LOGO_4MM  [QWIIC_4MM]  29.59,101.68 0 top
LOGO77  OSHW-LOGOS  [OSHW-LOGO-S]  35.31,90.68 0 bottom
LOGO78  SFE_LOGO_NAME_FLAME.1_INCH  [SFE_LOGO_NAME_FLAME_.1]  45.47,105.99 0 top
LOGO79  SFE_LOGO_NAME_FLAME.1_INCH  [SFE_LOGO_NAME_FLAME_.1]  45.47,105.99 0 bottom
LOGO80  QWIIC_LOGO_4MM  [QWIIC_4MM]  55.5,101.68 0 top
LOGO81  OSHW-LOGOS  [OSHW-LOGO-S]  61.21,90.68 0 bottom
LOGO82  SFE_LOGO_NAME_FLAME.1_INCH  [SFE_LOGO_NAME_FLAME_.1]  71.37,105.99 0 top
LOGO83  SFE_LOGO_NAME_FLAME.1_INCH  [SFE_LOGO_NAME_FLAME_.1]  71.37,105.99 0 bottom
LOGO84  QWIIC_LOGO_4MM  [QWIIC_4MM]  81.41,101.68 0 top
LOGO85  OSHW-LOGOS  [OSHW-LOGO-S]  87.12,90.68 0 bottom
LOGO86  SFE_LOGO_NAME_FLAME.1_INCH  [SFE_LOGO_NAME_FLAME_.1]  97.28,105.99 0 top
LOGO87  SFE_LOGO_NAME_FLAME.1_INCH  [SFE_LOGO_NAME_FLAME_.1]  97.28,105.99 0 bottom
LOGO88  QWIIC_LOGO_4MM  [QWIIC_4MM]  107.31,101.68 0 top
LOGO89  OSHW-LOGOS  [OSHW-LOGO-S]  113.03,90.68 0 bottom
LOGO90  SFE_LOGO_NAME_FLAME.1_INCH  [SFE_LOGO_NAME_FLAME_.1]  123.19,105.99 0 top
LOGO91  SFE_LOGO_NAME_FLAME.1_INCH  [SFE_LOGO_NAME_FLAME_.1]  123.19,105.99 0 bottom
LOGO92  QWIIC_LOGO_4MM  [QWIIC_4MM]  133.22,101.68 0 top
LOGO93  OSHW-LOGOS  [OSHW-LOGO-S]  138.94,90.68 0 bottom
LOGO94  SFE_LOGO_NAME_FLAME.1_INCH  [SFE_LOGO_NAME_FLAME_.1]  149.1,105.99 0 top
LOGO95  SFE_LOGO_NAME_FLAME.1_INCH  [SFE_LOGO_NAME_FLAME_.1]  149.1,105.99 0 bottom
LOGO96  QWIIC_LOGO_4MM  [QWIIC_4MM]  159.13,101.68 0 top
R1  4.7k  [0603]  19.56,15.93 180 top
R2  4.7k  [0603]  19.56,14.22 180 top
R3  1k  [0603]  25.91,14.48 180 top
R4  4.7k  [0603]  45.47,15.93 180 top
R5  4.7k  [0603]  45.47,14.22 180 top
R6  1k  [0603]  51.82,14.48 180 top
R7  4.7k  [0603]  71.37,15.93 180 top
R8  4.7k  [0603]  71.37,14.22 180 top
R9  1k  [0603]  77.72,14.48 180 top
R10  4.7k  [0603]  97.28,15.93 180 top
R11  4.7k  [0603]  97.28,14.22 180 top
R12  1k  [0603]  103.63,14.48 180 top
R13  4.7k  [0603]  123.19,15.93 180 top
R14  4.7k  [0603]  123.19,14.22 180 top
R15  1k  [0603]  129.54,14.48 180 top
R16  4.7k  [0603]  149.1,15.93 180 top
R17  4.7k  [0603]  149.1,14.22 180 top
R18  1k  [0603]  155.45,14.48 180 top
R19  4.7k  [0603]  19.56,41.83 180 top
R20  4.7k  [0603]  19.56,40.13 180 top
R21  1k  [0603]  25.91,40.39 180 top
R22  4.7k  [0603]  45.47,41.83 180 top
R23  4.7k  [0603]  45.47,40.13 180 top
R24  1k  [0603]  51.82,40.39 180 top
R25  4.7k  [0603]  71.37,41.83 180 top
R26  4.7k  [0603]  71.37,40.13 180 top
R27  1k  [0603]  77.72,40.39 180 top
R28  4.7k  [0603]  97.28,41.83 180 top
R29  4.7k  [0603]  97.28,40.13 180 top
R30  1k  [0603]  103.63,40.39 180 top
R31  4.7k  [0603]  123.19,41.83 180 top
R32  4.7k  [0603]  123.19,40.13 180 top
R33  1k  [0603]  129.54,40.39 180 top
R34  4.7k  [0603]  149.1,41.83 180 top
R35  4.7k  [0603]  149.1,40.13 180 top
R36  1k  [0603]  155.45,40.39 180 top
R37  4.7k  [0603]  19.56,67.74 180 top
R38  4.7k  [0603]  19.56,66.04 180 top
R39  1k  [0603]  25.91,66.29 180 top
R40  4.7k  [0603]  45.47,67.74 180 top
R41  4.7k  [0603]  45.47,66.04 180 top
R42  1k  [0603]  51.82,66.29 180 top
R43  4.7k  [0603]  71.37,67.74 180 top
R44  4.7k  [0603]  71.37,66.04 180 top
R45  1k  [0603]  77.72,66.29 180 top
R46  4.7k  [0603]  97.28,67.74 180 top
R47  4.7k  [0603]  97.28,66.04 180 top
R48  1k  [0603]  103.63,66.29 180 top
R49  4.7k  [0603]  123.19,67.74 180 top
R50  4.7k  [0603]  123.19,66.04 180 top
R51  1k  [0603]  129.54,66.29 180 top
R52  4.7k  [0603]  149.1,67.74 180 top
R53  4.7k  [0603]  149.1,66.04 180 top
R54  1k  [0603]  155.45,66.29 180 top
R55  4.7k  [0603]  19.56,93.65 180 top
R56  4.7k  [0603]  19.56,91.95 180 top
R57  1k  [0603]  25.91,92.2 180 top
R58  4.7k  [0603]  45.47,93.65 180 top
R59  4.7k  [0603]  45.47,91.95 180 top
R60  1k  [0603]  51.82,92.2 180 top
R61  4.7k  [0603]  71.37,93.65 180 top
R62  4.7k  [0603]  71.37,91.95 180 top
R63  1k  [0603]  77.72,92.2 180 top
R64  4.7k  [0603]  97.28,93.65 180 top
R65  4.7k  [0603]  97.28,91.95 180 top
R66  1k  [0603]  103.63,92.2 180 top
R67  4.7k  [0603]  123.19,93.65 180 top
R68  4.7k  [0603]  123.19,91.95 180 top
R69  1k  [0603]  129.54,92.2 180 top
R70  4.7k  [0603]  149.1,93.65 180 top
R71  4.7k  [0603]  149.1,91.95 180 top
R72  1k  [0603]  155.45,92.2 180 top
U1  ATECC608A  [DUAL_UDFN_2X3MM_SOIC-8]  19.56,19.56 270 top
U2  ATECC608A  [DUAL_UDFN_2X3MM_SOIC-8]  45.47,19.56 270 top
U3  ATECC608A  [DUAL_UDFN_2X3MM_SOIC-8]  71.37,19.56 270 top
U4  ATECC608A  [DUAL_UDFN_2X3MM_SOIC-8]  97.28,19.56 270 top
U5  ATECC608A  [DUAL_UDFN_2X3MM_SOIC-8]  123.19,19.56 270 top
U6  ATECC608A  [DUAL_UDFN_2X3MM_SOIC-8]  149.1,19.56 270 top
U7  ATECC608A  [DUAL_UDFN_2X3MM_SOIC-8]  19.56,45.47 270 top
U8  ATECC608A  [DUAL_UDFN_2X3MM_SOIC-8]  45.47,45.47 270 top
U9  ATECC608A  [DUAL_UDFN_2X3MM_SOIC-8]  71.37,45.47 270 top
U10  ATECC608A  [DUAL_UDFN_2X3MM_SOIC-8]  97.28,45.47 270 top
U11  ATECC608A  [DUAL_UDFN_2X3MM_SOIC-8]  123.19,45.47 270 top
U12  ATECC608A  [DUAL_UDFN_2X3MM_SOIC-8]  149.1,45.47 270 top
U13  ATECC608A  [DUAL_UDFN_2X3MM_SOIC-8]  19.56,71.37 270 top
U14  ATECC608A  [DUAL_UDFN_2X3MM_SOIC-8]  45.47,71.37 270 top
U15  ATECC608A  [DUAL_UDFN_2X3MM_SOIC-8]  71.37,71.37 270 top
U16  ATECC608A  [DUAL_UDFN_2X3MM_SOIC-8]  97.28,71.37 270 top
U17  ATECC608A  [DUAL_UDFN_2X3MM_SOIC-8]  123.19,71.37 270 top
U18  ATECC608A  [DUAL_UDFN_2X3MM_SOIC-8]  149.1,71.37 270 top
U19  ATECC608A  [DUAL_UDFN_2X3MM_SOIC-8]  19.56,97.28 270 top
U20  ATECC608A  [DUAL_UDFN_2X3MM_SOIC-8]  45.47,97.28 270 top
U21  ATECC608A  [DUAL_UDFN_2X3MM_SOIC-8]  71.37,97.28 270 top
U22  ATECC608A  [DUAL_UDFN_2X3MM_SOIC-8]  97.28,97.28 270 top
U23  ATECC608A  [DUAL_UDFN_2X3MM_SOIC-8]  123.19,97.28 270 top
U24  ATECC608A  [DUAL_UDFN_2X3MM_SOIC-8]  149.1,97.28 270 top
U$1  [#I2C#0]  15.75,18.16 0 bottom
U$2  [#SCL#0]  23.37,8.64 90 bottom
U$3  [#LED#0]  27.05,16.26 0 bottom
U$4  [#SDA#0]  20.83,8.64 90 bottom
U$5  [ATECC608A0]  19.33,24.74 0 top
U$6  [#3V3#0]  18.29,8.64 90 bottom
U$7  [ATECC608A0]  19.13,24.74 0 bottom
U$8  [CRYPTO_COPROCESSOR_LOGO_LARGE]  19.56,20.83 0 bottom
U$9  [CRYPTOGRAPHIC_CO#PROCESSOR0]  19.71,26.34 0 top
U$10  [CRYPTO_COPROCESSOR_LOGO_SMALL]  12.06,13.97 0 top
U$11  [PWR0]  29.59,13.34 0 top
U$12  [CRYPTOGRAPHIC_CO#PROCESSOR0]  45.62,26.34 0 top
U$13  [#SCL#0]  23.37,8.64 90 top
U$14  [CRYPTOGRAPHIC_CO#PROCESSOR0]  45.49,26.34 0 bottom
U$15  [#SCL#0]  49.28,8.64 90 top
U$16  [#SDA#0]  46.74,8.64 90 top
U$17  [#SDA#0]  20.83,8.64 90 top
U$18  [#3V3#0]  44.2,8.64 90 top
U$19  [CRYPTOGRAPHIC_CO#PROCESSOR0]  19.58,26.34 0 bottom
U$20  [#3V3#0]  18.29,8.64 90 top
U$21  [#GND#0]  15.75,8.64 90 top
U$22  [#GND#0]  41.66,8.64 90 top
U$23  [#GND#0]  15.75,8.64 90 bottom
U$24  [#SCL#0]  49.28,8.64 90 bottom
U$25  [#SDA#0]  46.74,8.64 90 bottom
U$26  [#3V3#0]  44.2,8.64 90 bottom
U$27  [#GND#0]  41.66,8.64 90 bottom
U$28  [#LED#0]  52.96,16.26 0 bottom
U$29  [#I2C#0]  41.66,18.16 0 bottom
U$30  [ATECC608A0]  45.24,24.74 0 top
U$31  [ATECC608A0]  45.03,24.74 0 bottom
U$32  [CRYPTO_COPROCESSOR_LOGO_LARGE]  45.47,20.83 0 bottom
U$33  [CRYPTO_COPROCESSOR_LOGO_SMALL]  37.97,13.97 0 top
U$34  [PWR0]  55.5,13.34 0 top
U$35  [CRYPTOGRAPHIC_CO#PROCESSOR0]  71.53,26.34 0 top
U$36  [CRYPTOGRAPHIC_CO#PROCESSOR0]  71.4,26.34 0 bottom
U$37  [#SCL#0]  75.18,8.64 90 top
U$38  [#SDA#0]  72.64,8.64 90 top
U$39  [#3V3#0]  70.1,8.64 90 top
U$40  [#GND#0]  67.56,8.64 90 top
U$41  [#SCL#0]  75.18,8.64 90 bottom
U$42  [#SDA#0]  72.64,8.64 90 bottom
U$43  [#3V3#0]  70.1,8.64 90 bottom
U$44  [#GND#0]  67.56,8.64 90 bottom
U$45  [#LED#0]  78.87,16.26 0 bottom
U$46  [#I2C#0]  67.56,18.16 0 bottom
U$47  [ATECC608A0]  71.15,24.74 0 top
U$48  [ATECC608A0]  70.94,24.74 0 bottom
U$49  [CRYPTO_COPROCESSOR_LOGO_LARGE]  71.37,20.83 0 bottom
U$50  [CRYPTO_COPROCESSOR_LOGO_SMALL]  63.88,13.97 0 top
U$51  [PWR0]  81.41,13.34 0 top
U$52  [CRYPTOGRAPHIC_CO#PROCESSOR0]  97.43,26.34 0 top
U$53  [CRYPTOGRAPHIC_CO#PROCESSOR0]  97.31,26.34 0 bottom
U$54  [#SCL#0]  101.09,8.64 90 top
U$55  [#SDA#0]  98.55,8.64 90 top
U$56  [#3V3#0]  96.01,8.64 90 top
U$57  [#GND#0]  93.47,8.64 90 top
U$58  [#SCL#0]  101.09,8.64 90 bottom
U$59  [#SDA#0]  98.55,8.64 90 bottom
U$60  [#3V3#0]  96.01,8.64 90 bottom
U$61  [#GND#0]  93.47,8.64 90 bottom
U$62  [#LED#0]  104.78,16.26 0 bottom
U$63  [#I2C#0]  93.47,18.16 0 bottom
U$64  [ATECC608A0]  97.05,24.74 0 top
U$65  [ATECC608A0]  96.85,24.74 0 bottom
U$66  [CRYPTO_COPROCESSOR_LOGO_LARGE]  97.28,20.83 0 bottom
U$67  [CRYPTO_COPROCESSOR_LOGO_SMALL]  89.79,13.97 0 top
U$68  [PWR0]  107.31,13.34 0 top
U$69  [CRYPTOGRAPHIC_CO#PROCESSOR0]  123.34,26.34 0 top
U$70  [CRYPTOGRAPHIC_CO#PROCESSOR0]  123.22,26.34 0 bottom
U$71  [#SCL#0]  127,8.64 90 top
U$72  [#SDA#0]  124.46,8.64 90 top
U$73  [#3V3#0]  121.92,8.64 90 top
U$74  [#GND#0]  119.38,8.64 90 top
U$75  [#SCL#0]  127,8.64 90 bottom
U$76  [#SDA#0]  124.46,8.64 90 bottom
U$77  [#3V3#0]  121.92,8.64 90 bottom
U$78  [#GND#0]  119.38,8.64 90 bottom
U$79  [#LED#0]  130.68,16.26 0 bottom
U$80  [#I2C#0]  119.38,18.16 0 bottom
U$81  [ATECC608A0]  122.96,24.74 0 top
U$82  [ATECC608A0]  122.76,24.74 0 bottom
U$83  [CRYPTO_COPROCESSOR_LOGO_LARGE]  123.19,20.83 0 bottom
U$84  [CRYPTO_COPROCESSOR_LOGO_SMALL]  115.7,13.97 0 top
U$85  [PWR0]  133.22,13.34 0 top
U$86  [CRYPTOGRAPHIC_CO#PROCESSOR0]  149.25,26.34 0 top
U$87  [CRYPTOGRAPHIC_CO#PROCESSOR0]  149.12,26.34 0 bottom
U$88  [#SCL#0]  152.91,8.64 90 top
U$89  [#SDA#0]  150.37,8.64 90 top
U$90  [#3V3#0]  147.83,8.64 90 top
U$91  [#GND#0]  145.29,8.64 90 top
U$92  [#SCL#0]  152.91,8.64 90 bottom
U$93  [#SDA#0]  150.37,8.64 90 bottom
U$94  [#3V3#0]  147.83,8.64 90 bottom
U$95  [#GND#0]  145.29,8.64 90 bottom
U$96  [#LED#0]  156.59,16.26 0 bottom
U$97  [#I2C#0]  145.29,18.16 0 bottom
U$98  [ATECC608A0]  148.87,24.74 0 top
U$99  [ATECC608A0]  148.67,24.74 0 bottom
U$100  [CRYPTO_COPROCESSOR_LOGO_LARGE]  149.1,20.83 0 bottom
U$101  [CRYPTO_COPROCESSOR_LOGO_SMALL]  141.61,13.97 0 top
U$102  [PWR0]  159.13,13.34 0 top
U$103  [CRYPTOGRAPHIC_CO#PROCESSOR0]  19.71,52.25 0 top
U$104  [CRYPTOGRAPHIC_CO#PROCESSOR0]  19.58,52.25 0 bottom
U$105  [#SCL#0]  23.37,34.54 90 top
U$106  [#SDA#0]  20.83,34.54 90 top
U$107  [#3V3#0]  18.29,34.54 90 top
U$108  [#GND#0]  15.75,34.54 90 top
U$109  [#SCL#0]  23.37,34.54 90 bottom
U$110  [#SDA#0]  20.83,34.54 90 bottom
U$111  [#3V3#0]  18.29,34.54 90 bottom
U$112  [#GND#0]  15.75,34.54 90 bottom
U$113  [#LED#0]  27.05,42.16 0 bottom
U$114  [#I2C#0]  15.75,44.07 0 bottom
U$115  [ATECC608A0]  19.33,50.65 0 top
U$116  [ATECC608A0]  19.13,50.65 0 bottom
U$117  [CRYPTO_COPROCESSOR_LOGO_LARGE]  19.56,46.74 0 bottom
U$118  [CRYPTO_COPROCESSOR_LOGO_SMALL]  12.06,39.88 0 top
U$119  [PWR0]  29.59,39.24 0 top
U$120  [CRYPTOGRAPHIC_CO#PROCESSOR0]  45.62,52.25 0 top
U$121  [CRYPTOGRAPHIC_CO#PROCESSOR0]  45.49,52.25 0 bottom
U$122  [#SCL#0]  49.28,34.54 90 top
U$123  [#SDA#0]  46.74,34.54 90 top
U$124  [#3V3#0]  44.2,34.54 90 top
U$125  [#GND#0]  41.66,34.54 90 top
U$126  [#SCL#0]  49.28,34.54 90 bottom
U$127  [#SDA#0]  46.74,34.54 90 bottom
U$128  [#3V3#0]  44.2,34.54 90 bottom
U$129  [#GND#0]  41.66,34.54 90 bottom
U$130  [#LED#0]  52.96,42.16 0 bottom
U$131  [#I2C#0]  41.66,44.07 0 bottom
U$132  [ATECC608A0]  45.24,50.65 0 top
U$133  [ATECC608A0]  45.03,50.65 0 bottom
U$134  [CRYPTO_COPROCESSOR_LOGO_LARGE]  45.47,46.74 0 bottom
U$135  [CRYPTO_COPROCESSOR_LOGO_SMALL]  37.97,39.88 0 top
U$136  [PWR0]  55.5,39.24 0 top
U$137  [CRYPTOGRAPHIC_CO#PROCESSOR0]  71.53,52.25 0 top
U$138  [CRYPTOGRAPHIC_CO#PROCESSOR0]  71.4,52.25 0 bottom
U$139  [#SCL#0]  75.18,34.54 90 top
U$140  [#SDA#0]  72.64,34.54 90 top
U$141  [#3V3#0]  70.1,34.54 90 top
U$142  [#GND#0]  67.56,34.54 90 top
U$143  [#SCL#0]  75.18,34.54 90 bottom
U$144  [#SDA#0]  72.64,34.54 90 bottom
U$145  [#3V3#0]  70.1,34.54 90 bottom
U$146  [#GND#0]  67.56,34.54 90 bottom
U$147  [#LED#0]  78.87,42.16 0 bottom
U$148  [#I2C#0]  67.56,44.07 0 bottom
U$149  [ATECC608A0]  71.15,50.65 0 top
U$150  [ATECC608A0]  70.94,50.65 0 bottom
U$151  [CRYPTO_COPROCESSOR_LOGO_LARGE]  71.37,46.74 0 bottom
U$152  [CRYPTO_COPROCESSOR_LOGO_SMALL]  63.88,39.88 0 top
U$153  [PWR0]  81.41,39.24 0 top
U$154  [CRYPTOGRAPHIC_CO#PROCESSOR0]  97.43,52.25 0 top
U$155  [CRYPTOGRAPHIC_CO#PROCESSOR0]  97.31,52.25 0 bottom
U$156  [#SCL#0]  101.09,34.54 90 top
U$157  [#SDA#0]  98.55,34.54 90 top
U$158  [#3V3#0]  96.01,34.54 90 top
U$159  [#GND#0]  93.47,34.54 90 top
U$160  [#SCL#0]  101.09,34.54 90 bottom
U$161  [#SDA#0]  98.55,34.54 90 bottom
U$162  [#3V3#0]  96.01,34.54 90 bottom
U$163  [#GND#0]  93.47,34.54 90 bottom
U$164  [#LED#0]  104.78,42.16 0 bottom
U$165  [#I2C#0]  93.47,44.07 0 bottom
U$166  [ATECC608A0]  97.05,50.65 0 top
U$167  [ATECC608A0]  96.85,50.65 0 bottom
U$168  [CRYPTO_COPROCESSOR_LOGO_LARGE]  97.28,46.74 0 bottom
U$169  [CRYPTO_COPROCESSOR_LOGO_SMALL]  89.79,39.88 0 top
U$170  [PWR0]  107.31,39.24 0 top
U$171  [CRYPTOGRAPHIC_CO#PROCESSOR0]  123.34,52.25 0 top
U$172  [CRYPTOGRAPHIC_CO#PROCESSOR0]  123.22,52.25 0 bottom
U$173  [#SCL#0]  127,34.54 90 top
U$174  [#SDA#0]  124.46,34.54 90 top
U$175  [#3V3#0]  121.92,34.54 90 top
U$176  [#GND#0]  119.38,34.54 90 top
U$177  [#SCL#0]  127,34.54 90 bottom
U$178  [#SDA#0]  124.46,34.54 90 bottom
U$179  [#3V3#0]  121.92,34.54 90 bottom
U$180  [#GND#0]  119.38,34.54 90 bottom
U$181  [#LED#0]  130.68,42.16 0 bottom
U$182  [#I2C#0]  119.38,44.07 0 bottom
U$183  [ATECC608A0]  122.96,50.65 0 top
U$184  [ATECC608A0]  122.76,50.65 0 bottom
U$185  [CRYPTO_COPROCESSOR_LOGO_LARGE]  123.19,46.74 0 bottom
U$186  [CRYPTO_COPROCESSOR_LOGO_SMALL]  115.7,39.88 0 top
U$187  [PWR0]  133.22,39.24 0 top
U$188  [CRYPTOGRAPHIC_CO#PROCESSOR0]  149.25,52.25 0 top
U$189  [CRYPTOGRAPHIC_CO#PROCESSOR0]  149.12,52.25 0 bottom
U$190  [#SCL#0]  152.91,34.54 90 top
U$191  [#SDA#0]  150.37,34.54 90 top
U$192  [#3V3#0]  147.83,34.54 90 top
U$193  [#GND#0]  145.29,34.54 90 top
U$194  [#SCL#0]  152.91,34.54 90 bottom
U$195  [#SDA#0]  150.37,34.54 90 bottom
U$196  [#3V3#0]  147.83,34.54 90 bottom
U$197  [#GND#0]  145.29,34.54 90 bottom
U$198  [#LED#0]  156.59,42.16 0 bottom
U$199  [#I2C#0]  145.29,44.07 0 bottom
U$200  [ATECC608A0]  148.87,50.65 0 top
U$201  [ATECC608A0]  148.67,50.65 0 bottom
U$202  [CRYPTO_COPROCESSOR_LOGO_LARGE]  149.1,46.74 0 bottom
U$203  [CRYPTO_COPROCESSOR_LOGO_SMALL]  141.61,39.88 0 top
U$204  [PWR0]  159.13,39.24 0 top
U$205  [CRYPTOGRAPHIC_CO#PROCESSOR0]  19.71,78.16 0 top
U$206  [CRYPTOGRAPHIC_CO#PROCESSOR0]  19.58,78.16 0 bottom
U$207  [#SCL#0]  23.37,60.45 90 top
U$208  [#SDA#0]  20.83,60.45 90 top
U$209  [#3V3#0]  18.29,60.45 90 top
U$210  [#GND#0]  15.75,60.45 90 top
U$211  [#SCL#0]  23.37,60.45 90 bottom
U$212  [#SDA#0]  20.83,60.45 90 bottom
U$213  [#3V3#0]  18.29,60.45 90 bottom
U$214  [#GND#0]  15.75,60.45 90 bottom
U$215  [#LED#0]  27.05,68.07 0 bottom
U$216  [#I2C#0]  15.75,69.98 0 bottom
U$217  [ATECC608A0]  19.33,76.56 0 top
U$218  [ATECC608A0]  19.13,76.56 0 bottom
U$219  [CRYPTO_COPROCESSOR_LOGO_LARGE]  19.56,72.64 0 bottom
U$220  [CRYPTO_COPROCESSOR_LOGO_SMALL]  12.06,65.79 0 top
U$221  [PWR0]  29.59,65.15 0 top
U$222  [CRYPTOGRAPHIC_CO#PROCESSOR0]  45.62,78.16 0 top
U$223  [CRYPTOGRAPHIC_CO#PROCESSOR0]  45.49,78.16 0 bottom
U$224  [#SCL#0]  49.28,60.45 90 top
U$225  [#SDA#0]  46.74,60.45 90 top
U$226  [#3V3#0]  44.2,60.45 90 top
U$227  [#GND#0]  41.66,60.45 90 top
U$228  [#SCL#0]  49.28,60.45 90 bottom
U$229  [#SDA#0]  46.74,60.45 90 bottom
U$230  [#3V3#0]  44.2,60.45 90 bottom
U$231  [#GND#0]  41.66,60.45 90 bottom
U$232  [#LED#0]  52.96,68.07 0 bottom
U$233  [#I2C#0]  41.66,69.98 0 bottom
U$234  [ATECC608A0]  45.24,76.56 0 top
U$235  [ATECC608A0]  45.03,76.56 0 bottom
U$236  [CRYPTO_COPROCESSOR_LOGO_LARGE]  45.47,72.64 0 bottom
U$237  [CRYPTO_COPROCESSOR_LOGO_SMALL]  37.97,65.79 0 top
U$238  [PWR0]  55.5,65.15 0 top
U$239  [CRYPTOGRAPHIC_CO#PROCESSOR0]  71.53,78.16 0 top
U$240  [CRYPTOGRAPHIC_CO#PROCESSOR0]  71.4,78.16 0 bottom
U$241  [#SCL#0]  75.18,60.45 90 top
U$242  [#SDA#0]  72.64,60.45 90 top
U$243  [#3V3#0]  70.1,60.45 90 top
U$244  [#GND#0]  67.56,60.45 90 top
U$245  [#SCL#0]  75.18,60.45 90 bottom
U$246  [#SDA#0]  72.64,60.45 90 bottom
U$247  [#3V3#0]  70.1,60.45 90 bottom
U$248  [#GND#0]  67.56,60.45 90 bottom
U$249  [#LED#0]  78.87,68.07 0 bottom
U$250  [#I2C#0]  67.56,69.98 0 bottom
U$251  [ATECC608A0]  71.15,76.56 0 top
U$252  [ATECC608A0]  70.94,76.56 0 bottom
U$253  [CRYPTO_COPROCESSOR_LOGO_LARGE]  71.37,72.64 0 bottom
U$254  [CRYPTO_COPROCESSOR_LOGO_SMALL]  63.88,65.79 0 top
U$255  [PWR0]  81.41,65.15 0 top
U$256  [CRYPTOGRAPHIC_CO#PROCESSOR0]  97.43,78.16 0 top
U$257  [CRYPTOGRAPHIC_CO#PROCESSOR0]  97.31,78.16 0 bottom
U$258  [#SCL#0]  101.09,60.45 90 top
U$259  [#SDA#0]  98.55,60.45 90 top
U$260  [#3V3#0]  96.01,60.45 90 top
U$261  [#GND#0]  93.47,60.45 90 top
U$262  [#SCL#0]  101.09,60.45 90 bottom
U$263  [#SDA#0]  98.55,60.45 90 bottom
U$264  [#3V3#0]  96.01,60.45 90 bottom
U$265  [#GND#0]  93.47,60.45 90 bottom
U$266  [#LED#0]  104.78,68.07 0 bottom
U$267  [#I2C#0]  93.47,69.98 0 bottom
U$268  [ATECC608A0]  97.05,76.56 0 top
U$269  [ATECC608A0]  96.85,76.56 0 bottom
U$270  [CRYPTO_COPROCESSOR_LOGO_LARGE]  97.28,72.64 0 bottom
U$271  [CRYPTO_COPROCESSOR_LOGO_SMALL]  89.79,65.79 0 top
U$272  [PWR0]  107.31,65.15 0 top
U$273  [CRYPTOGRAPHIC_CO#PROCESSOR0]  123.34,78.16 0 top
U$274  [CRYPTOGRAPHIC_CO#PROCESSOR0]  123.22,78.16 0 bottom
U$275  [#SCL#0]  127,60.45 90 top
U$276  [#SDA#0]  124.46,60.45 90 top
U$277  [#3V3#0]  121.92,60.45 90 top
U$278  [#GND#0]  119.38,60.45 90 top
U$279  [#SCL#0]  127,60.45 90 bottom
U$280  [#SDA#0]  124.46,60.45 90 bottom
U$281  [#3V3#0]  121.92,60.45 90 bottom
U$282  [#GND#0]  119.38,60.45 90 bottom
U$283  [#LED#0]  130.68,68.07 0 bottom
U$284  [#I2C#0]  119.38,69.98 0 bottom
U$285  [ATECC608A0]  122.96,76.56 0 top
U$286  [ATECC608A0]  122.76,76.56 0 bottom
U$287  [CRYPTO_COPROCESSOR_LOGO_LARGE]  123.19,72.64 0 bottom
U$288  [CRYPTO_COPROCESSOR_LOGO_SMALL]  115.7,65.79 0 top
U$289  [PWR0]  133.22,65.15 0 top
U$290  [CRYPTOGRAPHIC_CO#PROCESSOR0]  149.25,78.16 0 top
U$291  [CRYPTOGRAPHIC_CO#PROCESSOR0]  149.12,78.16 0 bottom
U$292  [#SCL#0]  152.91,60.45 90 top
U$293  [#SDA#0]  150.37,60.45 90 top
U$294  [#3V3#0]  147.83,60.45 90 top
U$295  [#GND#0]  145.29,60.45 90 top
U$296  [#SCL#0]  152.91,60.45 90 bottom
U$297  [#SDA#0]  150.37,60.45 90 bottom
U$298  [#3V3#0]  147.83,60.45 90 bottom
U$299  [#GND#0]  145.29,60.45 90 bottom
U$300  [#LED#0]  156.59,68.07 0 bottom
U$301  [#I2C#0]  145.29,69.98 0 bottom
U$302  [ATECC608A0]  148.87,76.56 0 top
U$303  [ATECC608A0]  148.67,76.56 0 bottom
U$304  [CRYPTO_COPROCESSOR_LOGO_LARGE]  149.1,72.64 0 bottom
U$305  [CRYPTO_COPROCESSOR_LOGO_SMALL]  141.61,65.79 0 top
U$306  [PWR0]  159.13,65.15 0 top
U$307  [CRYPTOGRAPHIC_CO#PROCESSOR0]  19.71,104.06 0 top
U$308  [CRYPTOGRAPHIC_CO#PROCESSOR0]  19.58,104.06 0 bottom
U$309  [#SCL#0]  23.37,86.36 90 top
U$310  [#SDA#0]  20.83,86.36 90 top
U$311  [#3V3#0]  18.29,86.36 90 top
U$312  [#GND#0]  15.75,86.36 90 top
U$313  [#SCL#0]  23.37,86.36 90 bottom
U$314  [#SDA#0]  20.83,86.36 90 bottom
U$315  [#3V3#0]  18.29,86.36 90 bottom
U$316  [#GND#0]  15.75,86.36 90 bottom
U$317  [#LED#0]  27.05,93.98 0 bottom
U$318  [#I2C#0]  15.75,95.89 0 bottom
U$319  [ATECC608A0]  19.33,102.46 0 top
U$320  [ATECC608A0]  19.13,102.46 0 bottom
U$321  [CRYPTO_COPROCESSOR_LOGO_LARGE]  19.56,98.55 0 bottom
U$322  [CRYPTO_COPROCESSOR_LOGO_SMALL]  12.06,91.69 0 top
U$323  [PWR0]  29.59,91.06 0 top
U$324  [CRYPTOGRAPHIC_CO#PROCESSOR0]  45.62,104.06 0 top
U$325  [CRYPTOGRAPHIC_CO#PROCESSOR0]  45.49,104.06 0 bottom
U$326  [#SCL#0]  49.28,86.36 90 top
U$327  [#SDA#0]  46.74,86.36 90 top
U$328  [#3V3#0]  44.2,86.36 90 top
U$329  [#GND#0]  41.66,86.36 90 top
U$330  [#SCL#0]  49.28,86.36 90 bottom
U$331  [#SDA#0]  46.74,86.36 90 bottom
U$332  [#3V3#0]  44.2,86.36 90 bottom
U$333  [#GND#0]  41.66,86.36 90 bottom
U$334  [#LED#0]  52.96,93.98 0 bottom
U$335  [#I2C#0]  41.66,95.89 0 bottom
U$336  [ATECC608A0]  45.24,102.46 0 top
U$337  [ATECC608A0]  45.03,102.46 0 bottom
U$338  [CRYPTO_COPROCESSOR_LOGO_LARGE]  45.47,98.55 0 bottom
U$339  [CRYPTO_COPROCESSOR_LOGO_SMALL]  37.97,91.69 0 top
U$340  [PWR0]  55.5,91.06 0 top
U$341  [CRYPTOGRAPHIC_CO#PROCESSOR0]  71.53,104.06 0 top
U$342  [CRYPTOGRAPHIC_CO#PROCESSOR0]  71.4,104.06 0 bottom
U$343  [#SCL#0]  75.18,86.36 90 top
U$344  [#SDA#0]  72.64,86.36 90 top
U$345  [#3V3#0]  70.1,86.36 90 top
U$346  [#GND#0]  67.56,86.36 90 top
U$347  [#SCL#0]  75.18,86.36 90 bottom
U$348  [#SDA#0]  72.64,86.36 90 bottom
U$349  [#3V3#0]  70.1,86.36 90 bottom
U$350  [#GND#0]  67.56,86.36 90 bottom
U$351  [#LED#0]  78.87,93.98 0 bottom
U$352  [#I2C#0]  67.56,95.89 0 bottom
U$353  [ATECC608A0]  71.15,102.46 0 top
U$354  [ATECC608A0]  70.94,102.46 0 bottom
U$355  [CRYPTO_COPROCESSOR_LOGO_LARGE]  71.37,98.55 0 bottom
U$356  [CRYPTO_COPROCESSOR_LOGO_SMALL]  63.88,91.69 0 top
U$357  [PWR0]  81.41,91.06 0 top
U$358  [CRYPTOGRAPHIC_CO#PROCESSOR0]  97.43,104.06 0 top
U$359  [CRYPTOGRAPHIC_CO#PROCESSOR0]  97.31,104.06 0 bottom
U$360  [#SCL#0]  101.09,86.36 90 top
U$361  [#SDA#0]  98.55,86.36 90 top
U$362  [#3V3#0]  96.01,86.36 90 top
U$363  [#GND#0]  93.47,86.36 90 top
U$364  [#SCL#0]  101.09,86.36 90 bottom
U$365  [#SDA#0]  98.55,86.36 90 bottom
U$366  [#3V3#0]  96.01,86.36 90 bottom
U$367  [#GND#0]  93.47,86.36 90 bottom
U$368  [#LED#0]  104.78,93.98 0 bottom
U$369  [#I2C#0]  93.47,95.89 0 bottom
U$370  [ATECC608A0]  97.05,102.46 0 top
U$371  [ATECC608A0]  96.85,102.46 0 bottom
U$372  [CRYPTO_COPROCESSOR_LOGO_LARGE]  97.28,98.55 0 bottom
U$373  [CRYPTO_COPROCESSOR_LOGO_SMALL]  89.79,91.69 0 top
U$374  [PWR0]  107.31,91.06 0 top
U$375  [CRYPTOGRAPHIC_CO#PROCESSOR0]  123.34,104.06 0 top
U$376  [CRYPTOGRAPHIC_CO#PROCESSOR0]  123.22,104.06 0 bottom
U$377  [#SCL#0]  127,86.36 90 top
U$378  [#SDA#0]  124.46,86.36 90 top
U$379  [#3V3#0]  121.92,86.36 90 top
U$380  [#GND#0]  119.38,86.36 90 top
U$381  [#SCL#0]  127,86.36 90 bottom
U$382  [#SDA#0]  124.46,86.36 90 bottom
U$383  [#3V3#0]  121.92,86.36 90 bottom
U$384  [#GND#0]  119.38,86.36 90 bottom
U$385  [#LED#0]  130.68,93.98 0 bottom
U$386  [#I2C#0]  119.38,95.89 0 bottom
U$387  [ATECC608A0]  122.96,102.46 0 top
U$388  [ATECC608A0]  122.76,102.46 0 bottom
U$389  [CRYPTO_COPROCESSOR_LOGO_LARGE]  123.19,98.55 0 bottom
U$390  [CRYPTO_COPROCESSOR_LOGO_SMALL]  115.7,91.69 0 top
U$391  [PWR0]  133.22,91.06 0 top
U$392  [CRYPTOGRAPHIC_CO#PROCESSOR0]  149.25,104.06 0 top
U$393  [CRYPTOGRAPHIC_CO#PROCESSOR0]  149.12,104.06 0 bottom
U$394  [#SCL#0]  152.91,86.36 90 top
U$395  [#SDA#0]  150.37,86.36 90 top
U$396  [#3V3#0]  147.83,86.36 90 top
U$397  [#GND#0]  145.29,86.36 90 top
U$398  [#SCL#0]  152.91,86.36 90 bottom
U$399  [#SDA#0]  150.37,86.36 90 bottom
U$400  [#3V3#0]  147.83,86.36 90 bottom
U$401  [#GND#0]  145.29,86.36 90 bottom
U$402  [#LED#0]  156.59,93.98 0 bottom
U$403  [#I2C#0]  145.29,95.89 0 bottom
U$404  [ATECC608A0]  148.87,102.46 0 top
U$405  [ATECC608A0]  148.67,102.46 0 bottom
U$406  [CRYPTO_COPROCESSOR_LOGO_LARGE]  149.1,98.55 0 bottom
U$407  [CRYPTO_COPROCESSOR_LOGO_SMALL]  141.61,91.69 0 top
U$408  [PWR0]  159.13,91.06 0 top

## Library data of the parts
C1-C24 = SparkFun-Capacitors; PROD_ID: CAP-00810
D1-D24 = SparkFun-LED; PROD_ID: DIO-00819
E$1-E$4 FD1-FD96 LOGO1-LOGO96 U$8 U$10 U$32 U$33 U$49 U$50 U$66 U$67 U$83 U$84 U$100 U$101 U$117 U$118 U$134 U$135 U$151 U$152 U$168 U$169 U$185 U$186 U$202 U$203 U$219 U$220 U$236 U$237 U$253 U$254 U$270 U$271 U$287 U$288 U$304 U$305 U$321 U$322 U$338 U$339 U$355 U$356 U$372 U$373 U$389 U$390 U$406 U$407 = SparkFun-Aesthetics
E$5 E$6 = SparkFun-Retired
H1-H96 = SparkFun-Hardware
I2C I2C1-I2C23 LED LED1-LED23 = SparkFun-Jumpers
J1 J2 J4 J6 J7 J9 J10 J12 J13 J15 J16 J18 J19 J21 J22 J24 J25 J27 J28 J30 J31 J33 J34 J36 J37 J39 J40 J42 J43 J45 J46 J48 J49 J51 J52 J54 J55 J57 J58 J60 J61 J63 J64 J66 J67 J69 J70 J72 = SparkFun-Connectors; PROD_ID: CONN-13694
J3 J5 J8 J11 J14 J17 J20 J23 J26 J29 J32 J35 J38 J41 J44 J47 J50 J53 J56 J59 J62 J65 J68 J71 = SparkFun-Connectors
R1 R2 R4 R5 R7 R8 R10 R11 R13 R14 R16 R17 R19 R20 R22 R23 R25 R26 R28 R29 R31 R32 R34 R35 R37 R38 R40 R41 R43 R44 R46 R47 R49 R50 R52 R53 R55 R56 R58 R59 R61 R62 R64 R65 R67 R68 R70 R71 = SparkFun-Resistors; PROD_ID: RES-07857
R3 R6 R9 R12 R15 R18 R21 R24 R27 R30 R33 R36 R39 R42 R45 R48 R51 R54 R57 R60 R63 R66 R69 R72 = SparkFun-Resistors; PROD_ID: RES-07856
U1-U24 = SparkFun-IC-Special-Function; PROD_ID: IC-15951
U$1-U$7 U$9 U$11-U$31 U$34-U$48 U$51-U$65 U$68-U$82 U$85-U$99 U$102-U$116 U$119-U$133 U$136-U$150 U$153-U$167 U$170-U$184 U$187-U$201 U$204-U$218 U$221-U$235 U$238-U$252 U$255-U$269 U$272-U$286 U$289-U$303 U$306-U$320 U$323-U$337 U$340-U$354 U$357-U$371 U$374-U$388 U$391-U$405 U$408 = output